# Altium PCB Communications_Board.PcbDoc
Units mm, origin at the board's own origin, x right, y up, seen from the top; angles counter-clockwise.
Board outline 85 x 80 mm, 4 copper layers (Top Layer, Gnd, DC Power, Bottom Layer), stack 1.782 mm thick; 97 components, 53 nets, 302 pads, 130 vias.
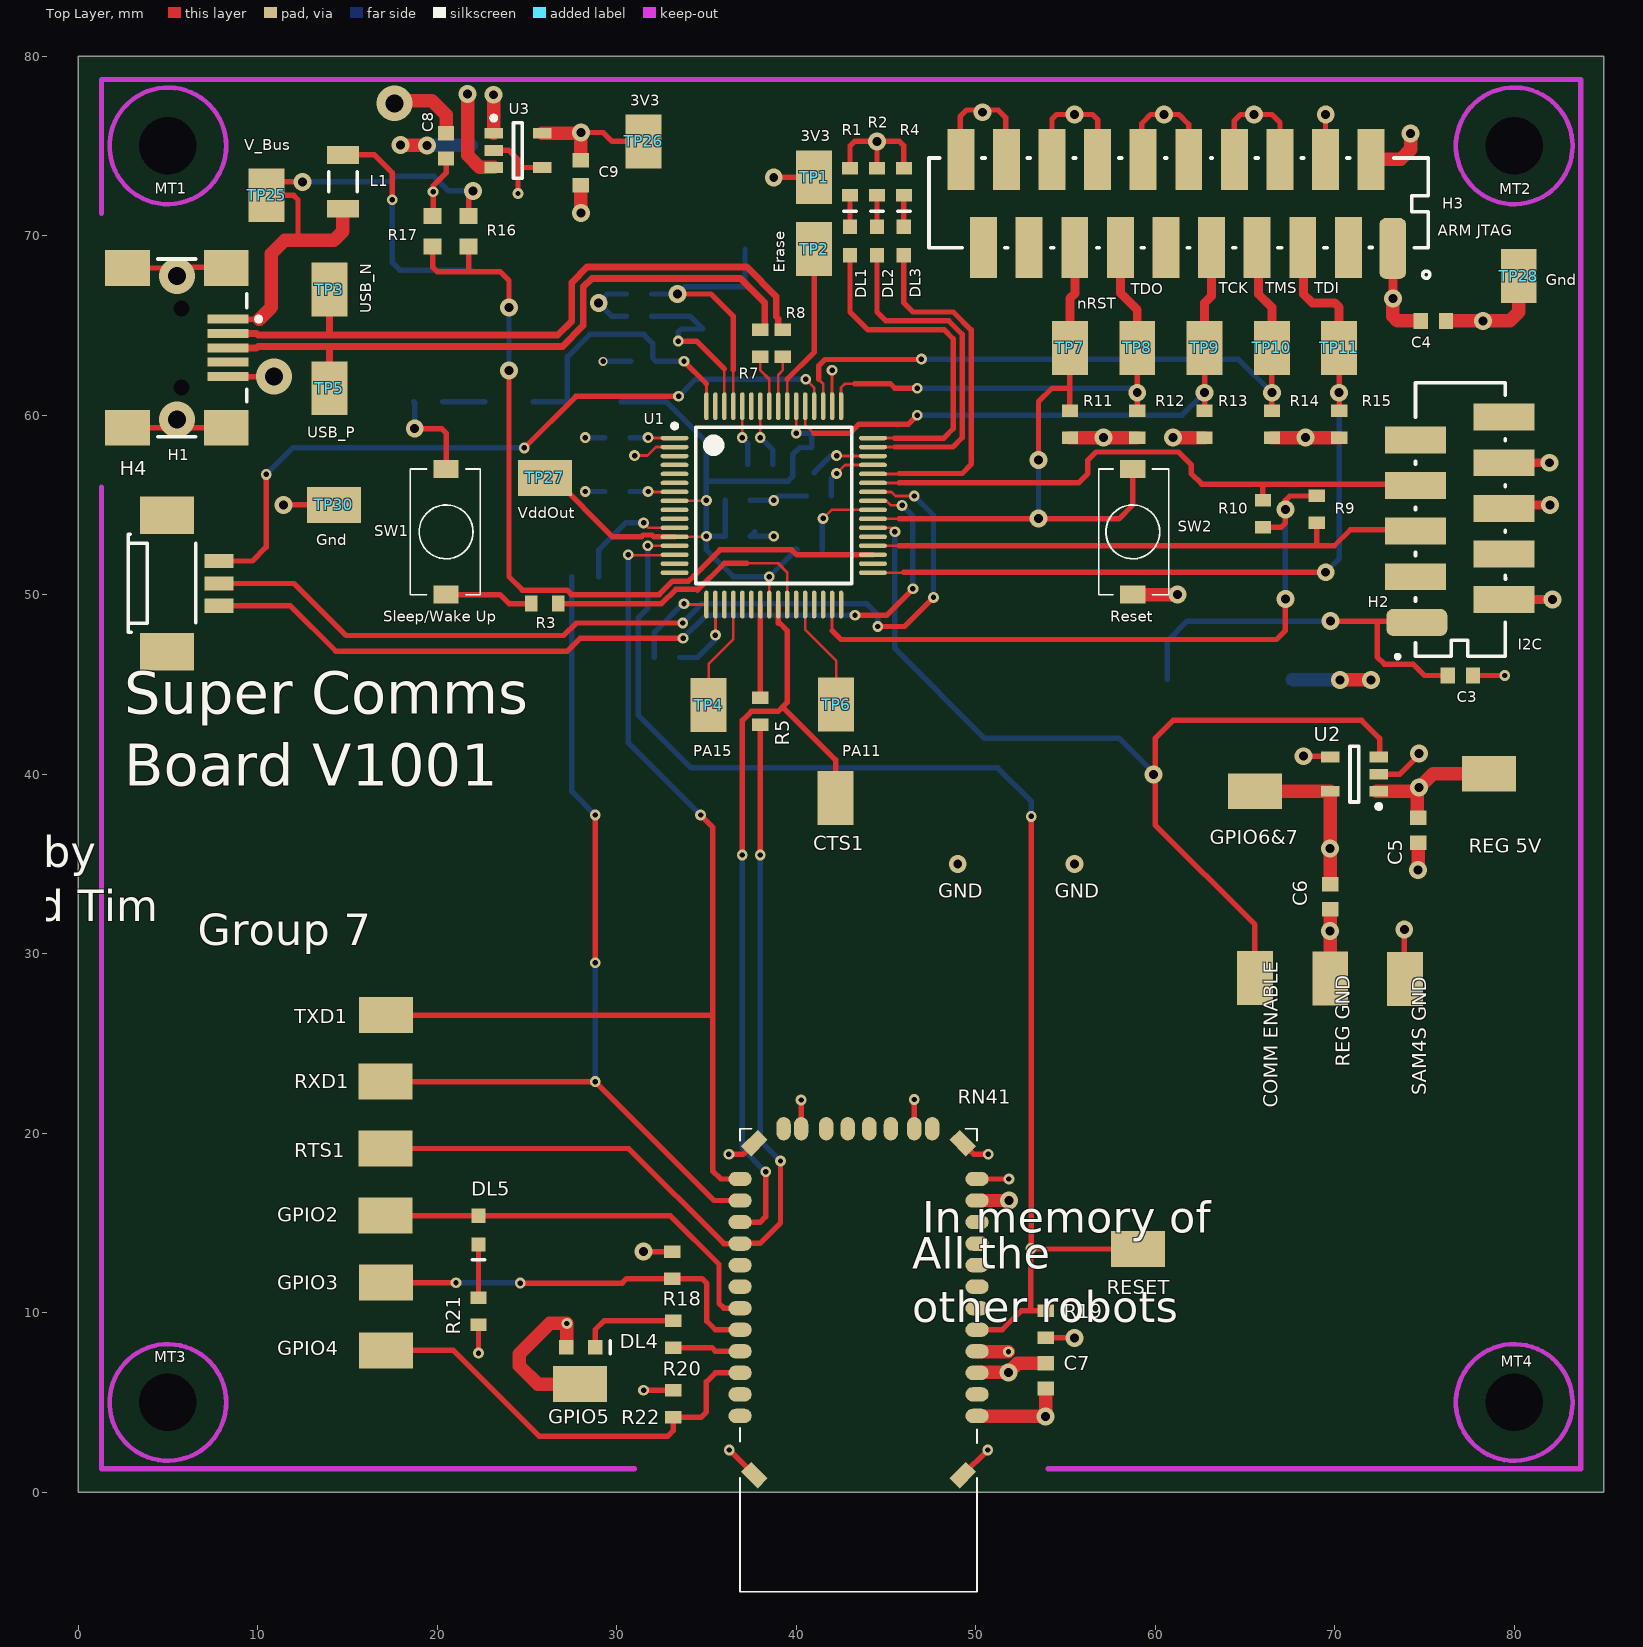
[diagram p0: Top Layer view]
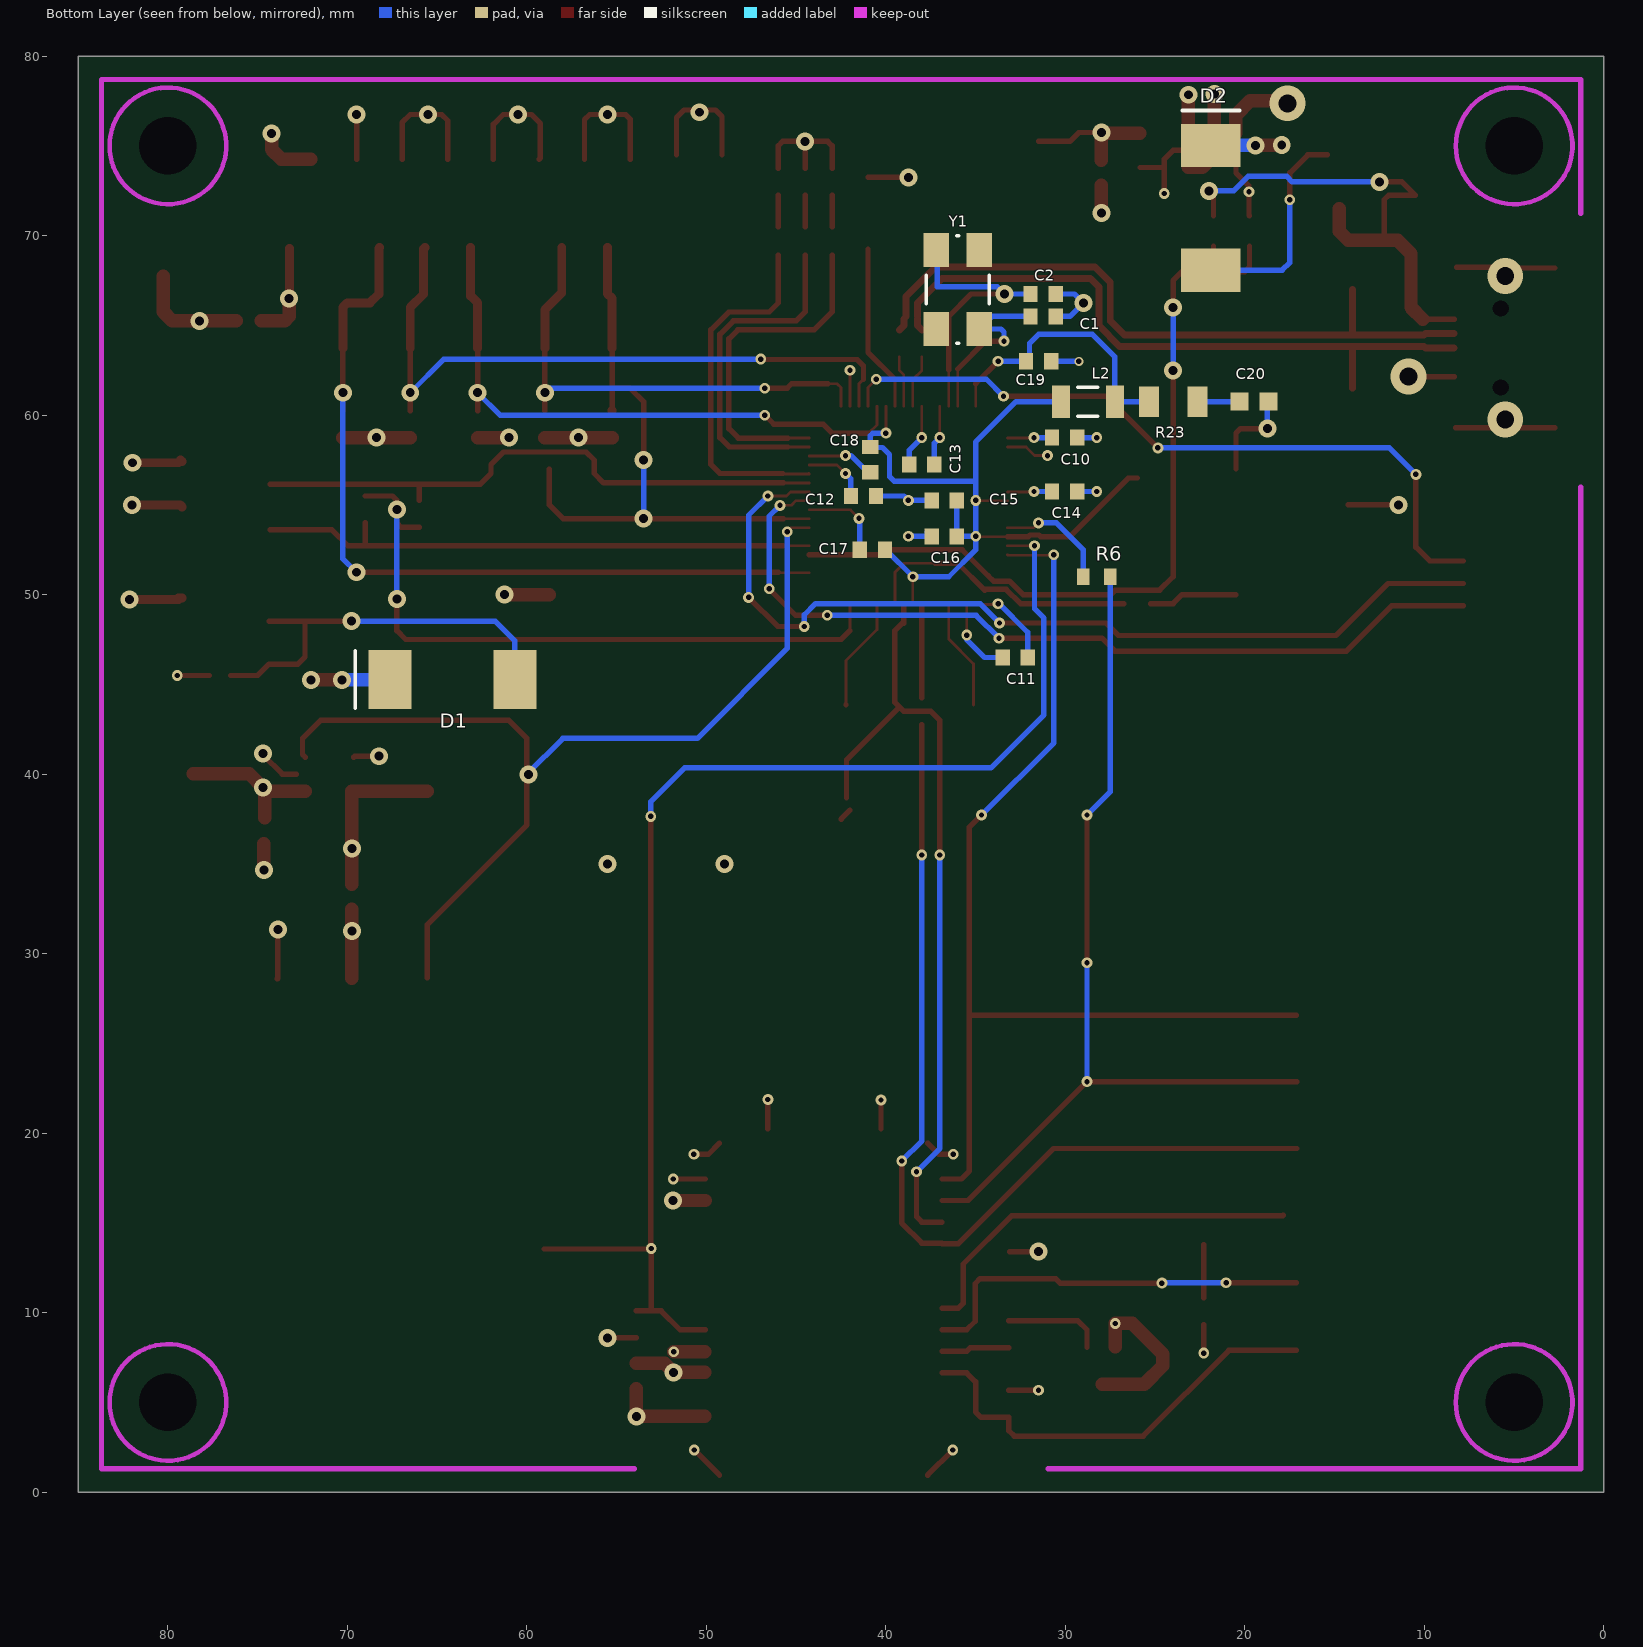
[diagram p1: Bottom Layer view, seen from below]
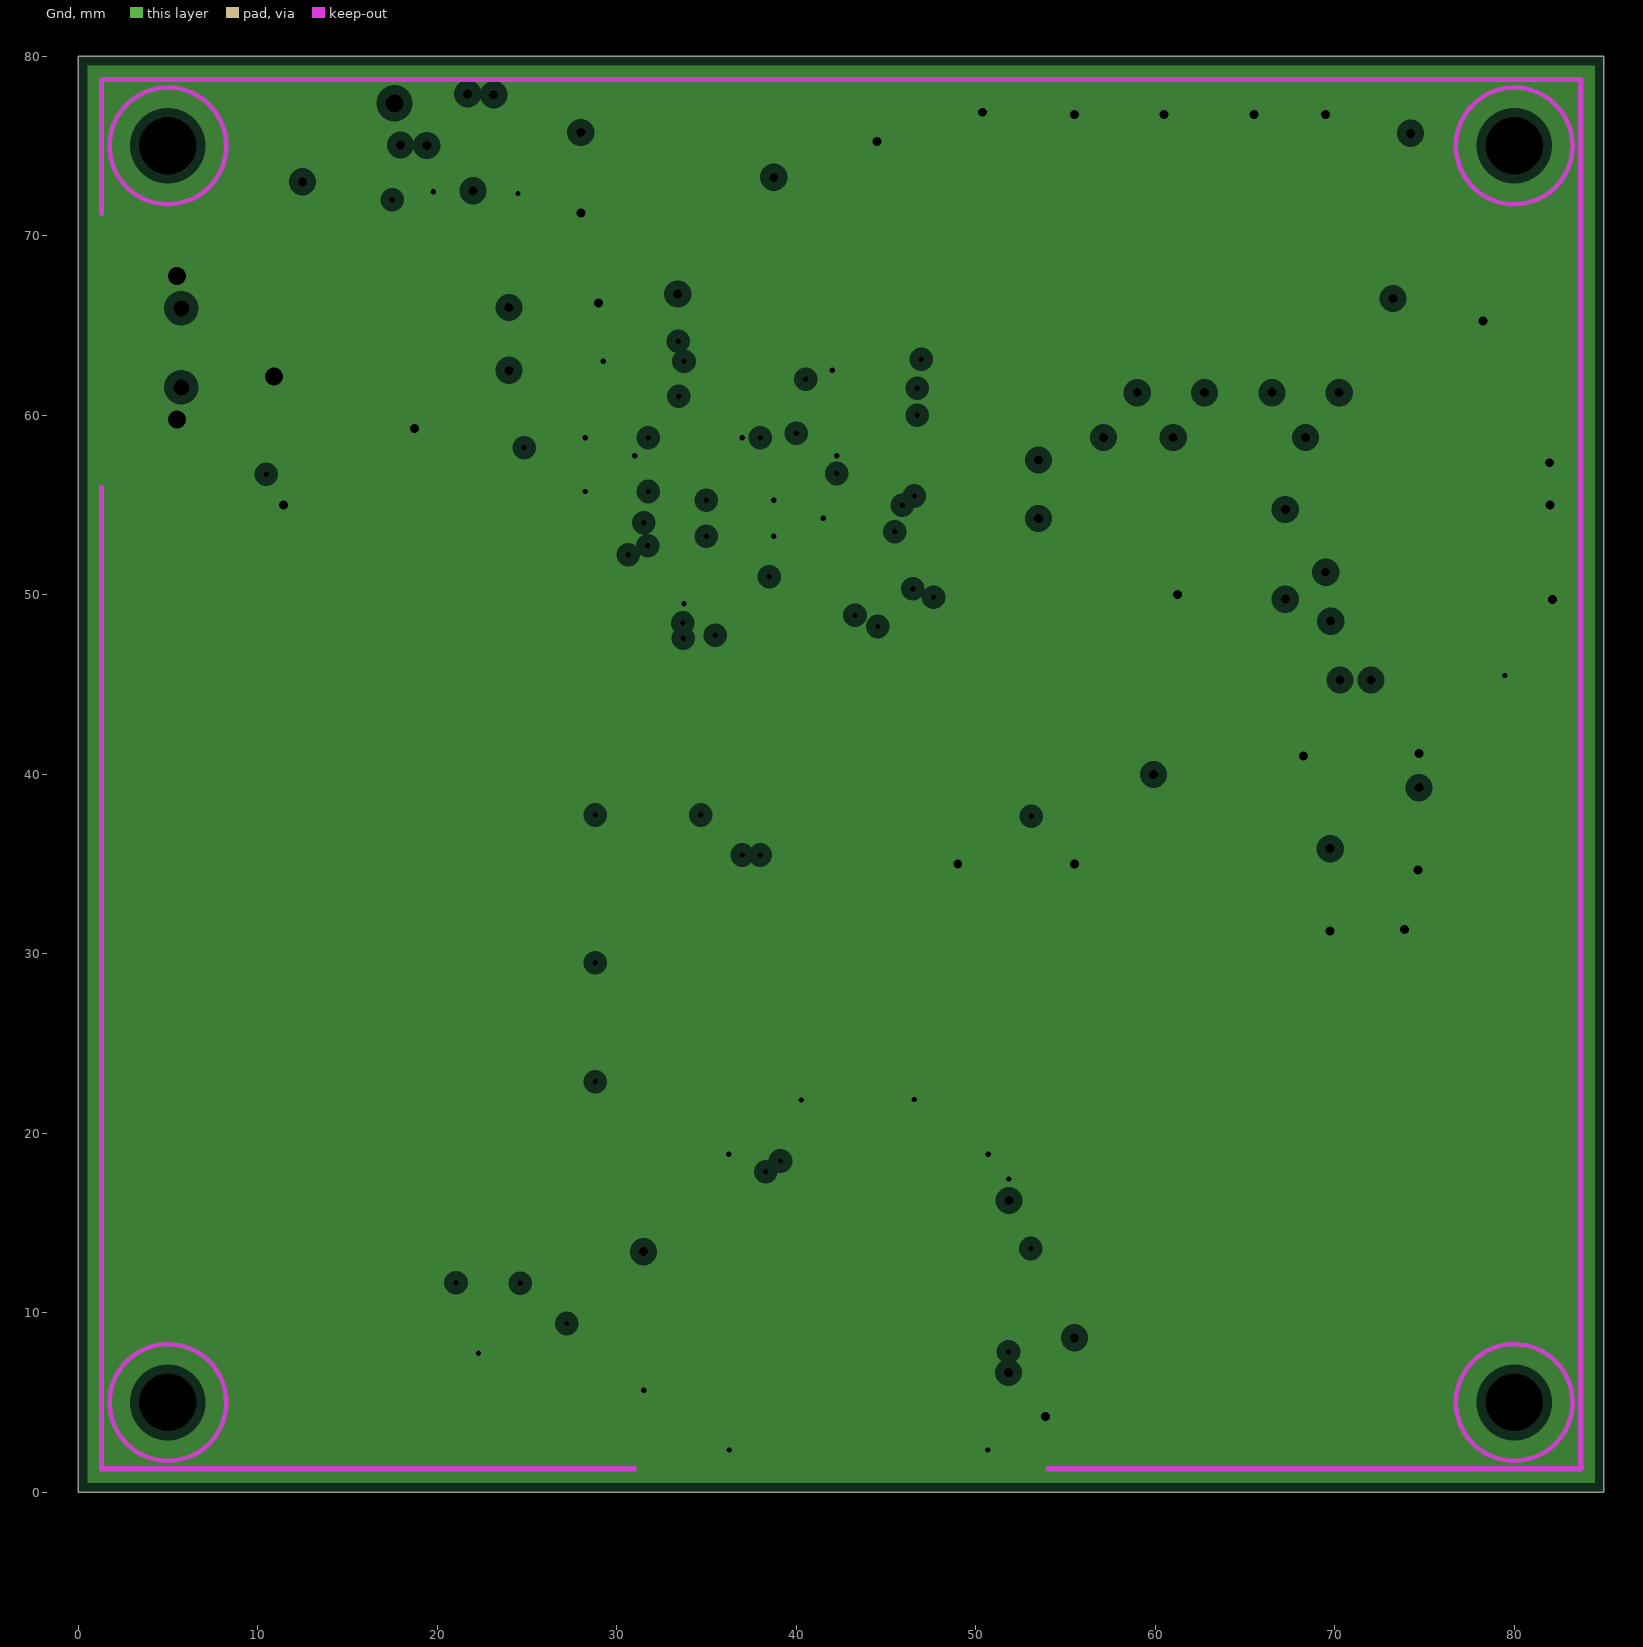
[diagram p2: Gnd, clearances drawn from the general rule]
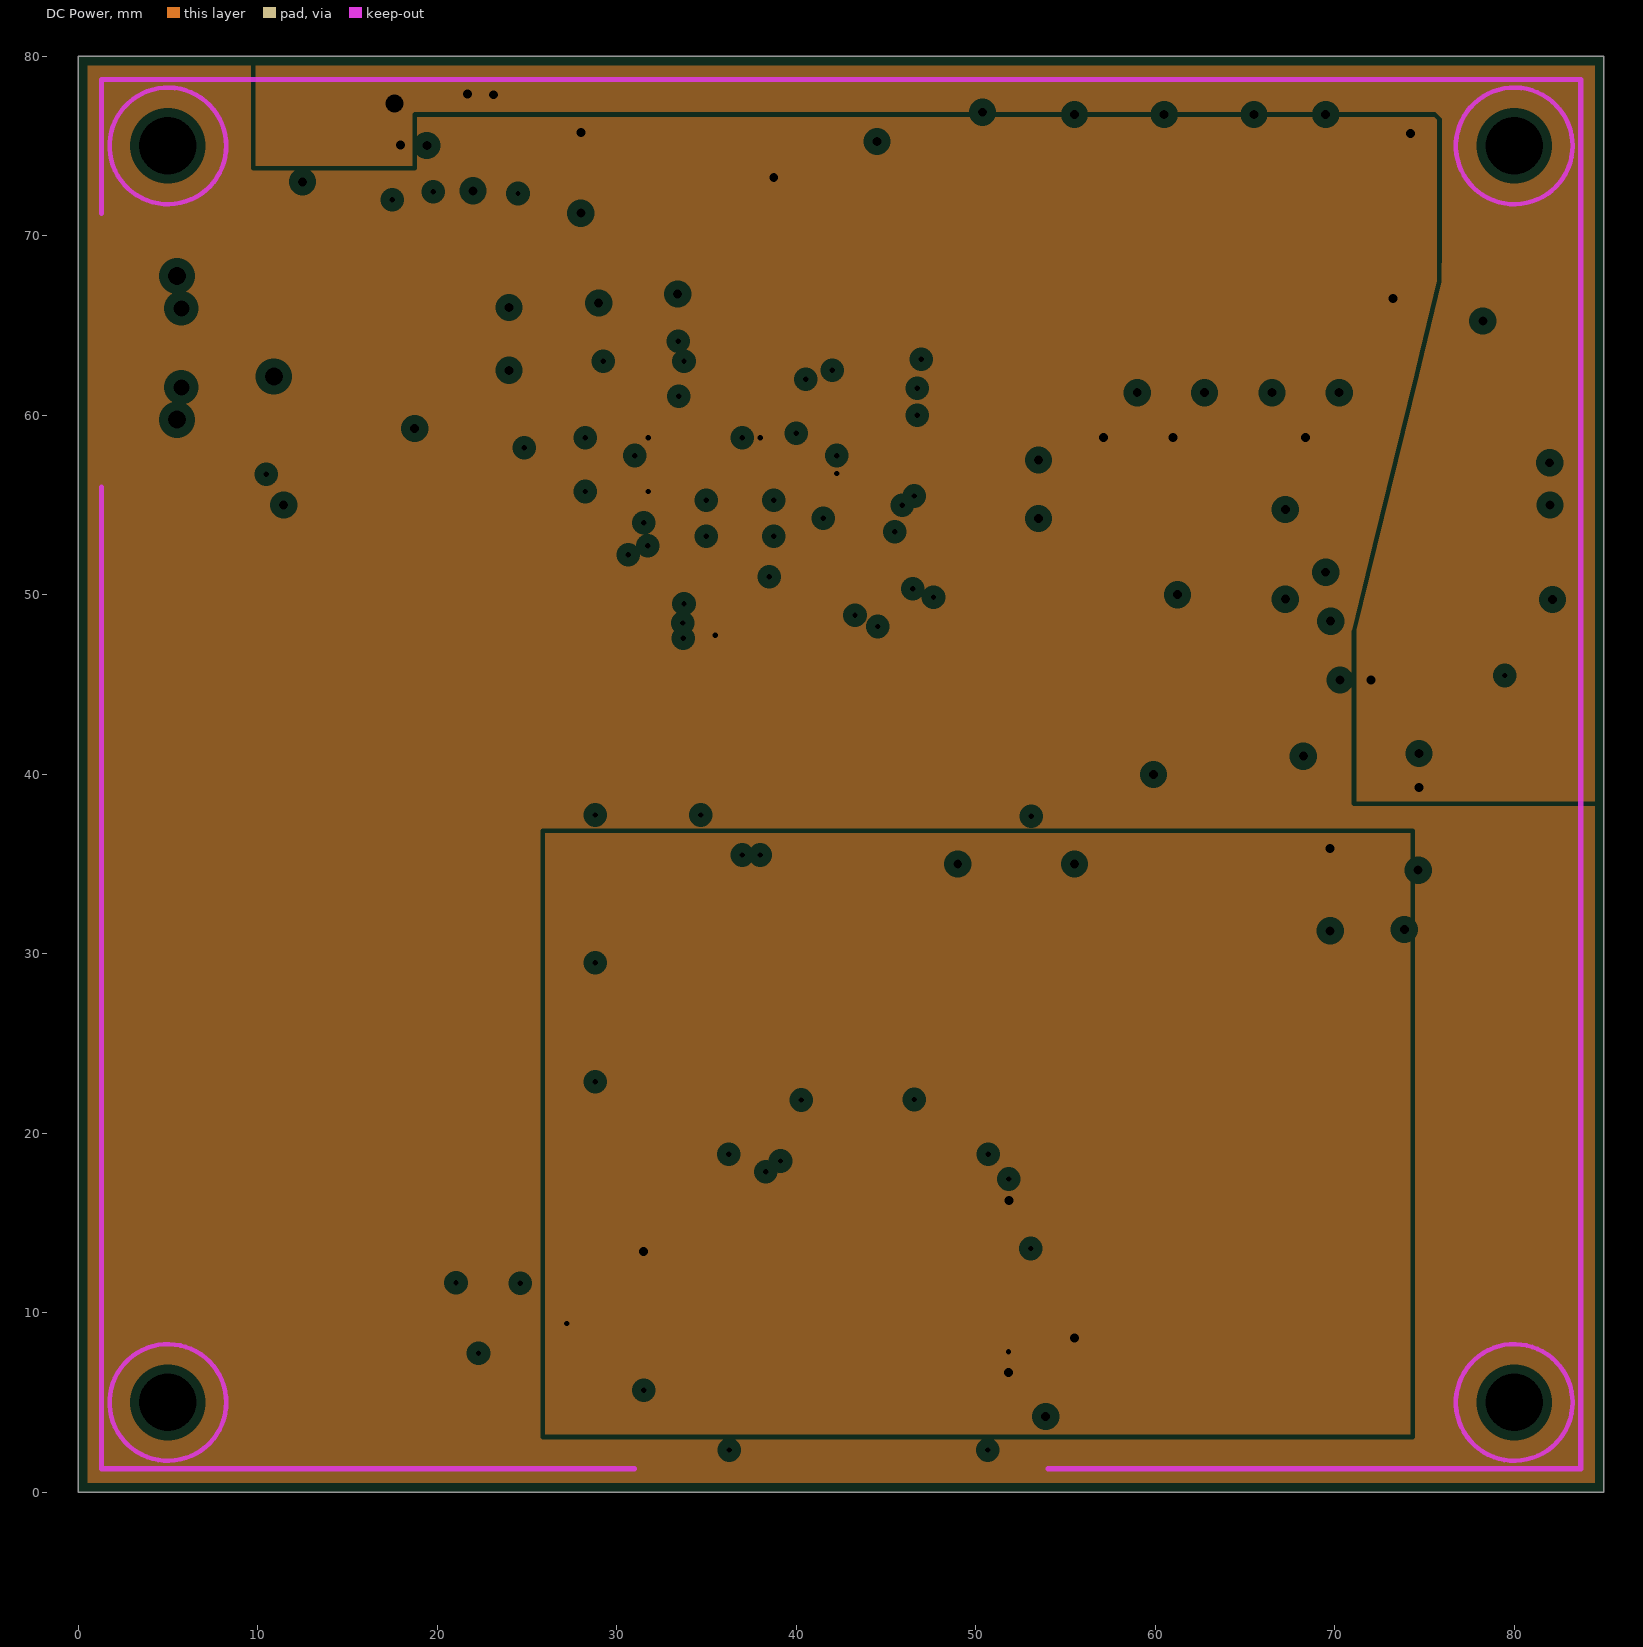
[diagram p3: DC Power, clearances drawn from the general rule]

## Layer stack, top to bottom
Top Solder: solder mask 0.0102, Solder Resist, Dk 3.5
Top Layer: signal copper 0.0356
Dielectric1: prepreg 0.32, FR-4, Dk 4.8
Gnd: plane copper 0.0356, net GND
Dielectric2: core 1, FR-4, Dk 4.8
DC Power: plane copper 0.0356, net (Multiple Nets)
Dielectric3: prepreg 0.32, FR-4, Dk 4.8
Bottom Layer: signal copper 0.0356
Bottom Solder: solder mask 0.0102, Solder Resist, Dk 3.5

## Board outline
0,0 85,0 85,80 0,80

## Design rules (kind name [scope] priority, off if disabled: settings)
Clearance Min_Clearance_Circuit_Labs [All] p1: gap=0.15 ignorepadtopadclearanceinfootprint=FALSE
DiffPairsRouting [All] p1: maxlimit=0.254 minlimit=0.254 mostfreqgap=0.254 toplayer_minwidth=0.381 toplayer_maxwidth=0.381 toplayer_prefwidth=0.381 bottomlayer_minwidth=0.381 bottomlayer_maxwidth=0.381 bottomlayer_prefwidth=0.381 maxuncoupledlength=12.7
FanoutControl Fanout_BGA [IsBGA] p1 off: bgadir=Out bgaviamode=Centered fanoutstyle=Auto fanoutdirection=Alternating viagrid=0.025 // Fanout_BGA (Default Rule)
HoleSize [All] p1: absolutevalues=TRUE maxlimit=10 minlimit=0.3 maxpercent=80.000 minpercent=20.000
MinimumAnnularRing [All] p1: minimumring=0.1
MinimumSolderMaskSliver [All] p1 off: minsoldermaskwidth=0.25
NetAntennae [All] p1: netantennaetolerance=1
PasteMaskExpansion [All] p1 off: expansion=0.2
PlaneClearance [All] p1: clearance=0.508
PlaneConnect [All] p1: planeconnectstyle=Relief reliefexpansion=0.508 reliefentries=4 reliefconductorwidth=0.254 reliefairgap=0.254
PolygonConnect [All] p1: connectstyle=Relief reliefconductorwidth=0.254 reliefentries=4 polygonreliefangle="90 Angle" airgapwidth=0.254
RoomDefinition Communications_Module [InComponentClass('Communications_Module')] p1: confinementstyle=ConfineIn formatcopy=TRUE lockcomponents=FALSE outline 4.2,-8.55 81.7,-8.55 81.7,44.8 4.2,44.8
RoomDefinition Communications_Board [InComponentClass('Communications_Board')] p2: confinementstyle=ConfineIn formatcopy=TRUE lockcomponents=FALSE outline -1.3,-0.175 83.675,-0.175 83.675,80.9 -1.3,80.9
RoomDefinition Communications_Power [InComponentClass('Communications_Power')] p3: confinementstyle=ConfineIn formatcopy=TRUE lockcomponents=FALSE outline 8.2,25 82.675,25 82.675,77.8 8.2,77.8
RoutingVias [All] p1: holewidth=0.5 width=1 viastyle="Through Hole" minholewidth=0.3 minwidth=0.6 maxholewidth=1 maxwidth=2
SMDNeckDown [All] p1 off: percent=50.000
SMDToCorner [All] p1: distance=98425
SMDToPlane [All] p1: distance=1968504
SilkToSolderMaskClearance SilkscreenOverComponentPads [IsPad] p1: minsilkscreentomaskgap=0.11 clearancetoexposedcopper=TRUE
SolderMaskExpansion [All] p1: expansion=0.102
ViasUnderSMD [All] p1: allowed=FALSE
Width [All] p1: maxlimit=2 minlimit=0.15 preferedwidth=0.3
21 further rules are at their usual default settings.

## Classes and differential pairs
net class TP17_Nets: +3V3COMM
net class TP14_Nets: NetTP14_1
net class TP29_Nets: GND
net class TP24_Nets: NetRN41_13
net class TP23_Nets: NetR22_2
net class TP22_Nets: NetR6_2
net class TP21_Nets: NetRN41_15
net class TP20_Nets: NetR5_2
net class TP19_Nets: NetR19_1
net class TP18_Nets: NetDL5_2
net class DL4_Nets: +3V3COMM NetDL4_1 NetTP18_1
net class TP16_Nets: +3V3COMM
net class TP13_Nets: GND
net class TP12_Nets: +5V
net class R23_Nets: NetC19_2 NetC20_2
net class R22_Nets: GND NetR22_2
net class R21_Nets: GND NetDL5_1
net class R20_Nets: NetDL4_1 NetR20_1
net class R19_Nets: +3V3COMM NetR19_1
net class R18_Nets: +3V3COMM NetR18_1
net class R10_Nets: NetR9_2 SDA
net class R9_Nets: NetR9_2 SCL
net class L2_Nets: NetC19_2 VDDOUT
net class H4_Nets: GPIO1 GPIO2 GPIO3
net class TP28_Nets: GND
net class DL5_Nets: NetDL5_1 NetDL5_2
net class D2_Nets: +5V NetD2_1
net class D1_Nets: +5V NetC3_2
net class C20_Nets: GND NetC20_2
net class C19_Nets: GND NetC19_2
net class C14_Nets: +3V3 GND
net class C13_Nets: +3V3 GND
component class Communications_Module: C5 C6 C7 "COMM ENABLE" CTS1 DL4 DL5 GPIO2 GPIO3 GPIO4 GPIO5 GPIO6&7 R18 R19 R20 R21 R22 "REG 5V" "REG GND" RESET RN41 RTS1 RXD1 TP13 TP17 TP18 TP19 TP20 TP21 TP22 TP23 TXD1 U2
net class C17_Nets: GND VDDOUT
net class C16_Nets: GND VDDOUT
net class C12_Nets: +3V3 GND
net class C3_Nets: GND NetC3_2 NetR16_1
component class Communications_Board: C1 C2 C3 C4 D1 DL1 DL2 DL3 H1 H2 H3 H4 MT1 MT2 MT3 MT4 R1 R2 R3 R4 R5 R6 R7 R8 R9 R10 R11 R12 R13 R14 R15 R16 R17 SW1 SW2 TP1 TP2 TP3 TP4 TP5 TP6 TP7 TP8 TP9 TP10 TP11 U1 Y1
component class Communications_Power: C8 C9 C10 C11 C12 C13 C14 C15 C16 C17 C18 C19 C20 D2 L1 L2 R23 "REG 5V" TP25 TP26 TP27 TP28 TP30 U3
net class C1_Nets: GND NetC1_2
net class C2_Nets: GND NetC2_2
net class C11_Nets: +3V3 GND
net class C4_Nets: +3V3 GND
net class C5_Nets: +5V GND
net class C6_Nets: +3V3COMM GND
net class C7_Nets: +3V3COMM GND
net class RN41_Nets: +3V3COMM GND NetDL5_2 NetR5_2 NetR6_2 NetR18_1 NetR19_1 NetR20_1 NetR22_2 NetRN41_13 NetRN41_15
net class C9_Nets: +3V3 GND
net class C10_Nets: +3V3 GND
net class TP30_Nets: GND
net class C18_Nets: GND VDDOUT
net class C15_Nets: GND VDDOUT
net class DL1_Nets: LED1 NetDL1_1
net class DL2_Nets: LED2 NetDL2_1
net class DL3_Nets: LED3 NetDL3_1
net class H1_Nets: GND NetH1_4 USB_N USB_P VBUS
net class H2_Nets: GND NetC3_2 NetH2_3 NetH2_4 NetH2_9 NetH2_10 SCL SDA
net class H3_Nets: +3V3 GND NetH3_3 NetH3_11 NetH3_17 NetH3_19 NRST TCK TDI TDO TMS
net class U2_Nets: +3V3COMM +5V GND NetTP14_1
net class L1_Nets: NetD2_1 VBUS
net class R1_Nets: GND NetDL1_1
net class R2_Nets: GND NetDL2_1
net class R3_Nets: NetR3_1 NetR3_2
net class R4_Nets: GND NetDL3_1
net class R5_Nets: NetR5_1 NetR5_2
net class R6_Nets: NetR6_1 NetR6_2
net class R7_Nets: NetR7_2 USB_P
net class R8_Nets: NetR8_2 USB_N
net class R11_Nets: +3V3 NRST
net class R12_Nets: +3V3 TDO
net class R13_Nets: +3V3 TCK
net class R14_Nets: +3V3 TMS
net class R15_Nets: +3V3 TDI
net class R16_Nets: "USB DETECT" VBUS
net class R17_Nets: GND "USB DETECT"
net class SW1_Nets: GND NetR3_2
net class SW2_Nets: GND NRST
net class TP1_Nets: +3V3
net class TP2_Nets: ERASE
net class TP3_Nets: USB_N
net class TP4_Nets: NetTP4_1
net class TP5_Nets: USB_P
net class TP6_Nets: NetTP6_1
net class TP7_Nets: NRST
net class TP8_Nets: TDO
net class TP9_Nets: TCK
net class TP10_Nets: TMS
net class TP11_Nets: TDI
net class TP25_Nets: VBUS
net class TP26_Nets: +3V3
net class TP27_Nets: VDDOUT
net class TP15_Nets: NetR18_1
net class U1_Nets: +3V3 ERASE GND GPIO1 GPIO2 GPIO3 LED1 LED2 LED3 NetC1_2 NetC2_2 NetC19_2 NetR3_1 NetR5_1 NetR6_1 NetR7_2 NetR8_2 NetR9_2 NetR19_1 NetRN41_13 NetRN41_15 NetTP4_1 NetTP6_1 NetTP14_1 NetU1_3 NetU1_4 NetU1_5 NetU1_6 NetU1_9 NetU1_10 NetU1_11 NetU1_13 NetU1_14 NetU1_15 NetU1_16 NetU1_19 NetU1_21 NetU1_22 NetU1_23 NetU1_25 NetU1_27 NetU1_29 NetU1_30 NetU1_32 NetU1_34 NetU1_37 NetU1_38 NetU1_41 NetU1_42 NetU1_52 NetU1_59 NetU1_63 NRST SCL SDA TCK TDI TDO TMS "USB DETECT" VDDOUT
net class U3_Nets: +3V3 +5V GND
net class Y1_Nets: NetC1_2 NetC2_2
net class C8_Nets: +5V GND
differential pair USB: +USB_P -USB_N

## Components (designator, comment, footprint, x,y, rotation, side; value= is the part's Value field where it differs from the comment)
C1 "10pF" CAPC1608L 31.25,65.5 r0 bottom
C2 "10pF" CAPC1608L 31.25,66.75 r0 bottom
C3 "100nF" CAPC1608L 77,45.5 r180 top
C4 "100nF" CAPC1608L 75.5,65.25 r180 top
C5 "10uF" CAPC1608L 74.65,36.875 r270 top
C6 "10uF" CAPC1608L 69.75,33.175 r270 top
C7 "100pF" CAPC1608L 53.9,6.475 r90 top
C8 "10uF" CAPC1608L 20.5,75 r270 top
C9 "10uF" CAPC1608L 28,73.5 r270 top
C10 "100nF" CAPC1608L 30.05,58.75 r0 bottom
C11 "100nF" CAPC1608L 32.8,46.5 r0 bottom
C12 "100nF" CAPC1608L 41.25,55.5 r0 bottom
C13 "100nF" CAPC1608L 38,57.25 r0 bottom
C14 "100nF" CAPC1608L 30.05,55.75 r0 bottom
C15 "100nF" CAPC1608L 36.75,55.25 r180 bottom
C16 "100nF" CAPC1608L 36.75,53.25 r180 bottom
C17 "100nF" CAPC1608L 40.75,52.5 r180 bottom
C18 "100nF" CAPC1608L 40.875,57.525 r90 bottom
C19 "100nF" CAPC1608L 31.5,63 r0 bottom
C20 "4.7uF" CAPC1608N 19.5,60.75 r0 bottom
"COMM ENABLE" "Gnd" TP_0805 65.55,28.65 r90 top (schematic designator TP14)
CTS1 "Gnd" TP_0805 42.2,38.675 r90 top (schematic designator TP21)
D1 "VS-30BQ015TRPBF" SMC 64.15,45.275 r0 bottom
D2 "VS-30BQ015TRPBF" SMC 21.9,71.55 r90 bottom
DL1 "Dark Green" WL-SMCW0603 43,70.5 r270 top
DL2 "Yellow" WL-SMCW0603 44.5,70.5 r270 top
DL3 "Red" WL-SMCW0603 46,70.5 r270 top
DL4 "Blue" WL-SMCW0603 28.8,8.075 r180 top
DL5 "Blue" WL-SMCW0603 22.3,13.8 r90 top
GPIO2 "Gnd" TP_0805 17.125,15.425 r0 top (schematic designator TP18)
GPIO3 "Gnd" TP_0805 17.15,11.675 r0 top (schematic designator TP15)
GPIO4 "Gnd" TP_0805 17.15,7.9 r0 top (schematic designator TP23)
GPIO5 "Gnd" TP_0805 27.95,6.025 r180 top (schematic designator TP17)
GPIO6&7 "Gnd" TP_0805 65.55,39.05 r0 top (schematic designator TP16)
H1 "JS_USB_MINI_B" USB/SM0.8-6H5 0.5,63.75 r180 top
H2 "I2C" 188275-10 76.961,54.175 r90 top
H3 "ARM JTAG" 188275-20 61.235,71.789 r180 top
H4 "SMD Horiz 1.25mm" SD-53261-0319 7.85,51.875 r90 top
L1 "Ferrite Bead" INDC3216L 14.75,73 r90 top value="1A max, Idc 0.3R,"
L2 "Ferrite Bead" INDC3216L 28.75,60.75 r0 bottom value="1A max, Idc 0.3R,"
MT1 "M3.2 NPTH" MNT-HOLE_3.2mm_NPTH 5,75 r0 top
MT2 "M3.2 NPTH" MNT-HOLE_3.2mm_NPTH 80,75 r0 top
MT3 "M3.2 NPTH" MNT-HOLE_3.2mm_NPTH 5,5 r0 top
MT4 "M3.2 NPTH" MNT-HOLE_3.2mm_NPTH 80,5 r0 top
R1 "62R" RESC1608L 43,73 r90 top
R2 "220R" RESC1608L 44.5,73 r90 top
R3 "2K2" RESC1608L 26,49.5 r180 top
R4 "220R" RESC1608L 46,73 r90 top
R5 "1K" RESC1608L 38,43.5 r270 top
R6 "1K" RESC1608L 28.25,51 r180 bottom
R7 "27R" RESC1608L 38,64 r270 top
R8 "27R" RESC1608L 39.25,64 r270 top
R9 "2K2" RESC1608L 69,54.75 r90 top
R10 "2K2" RESC1608L 66,54.5 r270 top
R11 "100K" RESC1608L 55.25,59.5 r270 top
R12 "100K" RESC1608L 59,59.5 r270 top
R13 "100K" RESC1608L 62.75,59.5 r270 top
R14 "100K" RESC1608L 66.5,59.5 r270 top
R15 "100K" RESC1608L 70.25,59.5 r270 top
R16 "27K" RESC1608N 21.75,70.25 r90 top
R17 "47K" RESC1608N 19.75,70.25 r270 top
R18 "100K" RESC1608L 33.1,12.65 r90 top
R19 "1K" RESC1608L 53.9,9.35 r270 top
R20 "220R" RESC1608L 33.15,8.8 r90 top
R21 "220R" RESC1608L 22.3,10.075 r270 top
R22 "100K" RESC1608L 33.15,4.925 r270 top
R23 "1R" RESC3216L 24,60.75 r0 bottom
"REG 5V" "V_Bus" TP_0805 78.6,40.025 r0 top (schematic designator TP12)
"REG GND" "Gnd" TP_0805 69.75,28.625 r270 top (schematic designator TP13)
RESET "Gnd" TP_0805 59.05,13.55 r0 top (schematic designator TP19)
RN41 "RN41" PCBComponent_1 43.475,7.675 r180 top
RTS1 "Gnd" TP_0805 17.125,19.15 r180 top (schematic designator TP20)
RXD1 "Gnd" TP_0805 17.125,22.875 r0 top (schematic designator TP22)
"SAM4S GND" "Gnd" TP_0805 73.925,28.6 r270 top (schematic designator TP29)
SW1 "Sleep/Wake Up" KSR211G 20.5,50 r90 top
SW2 "Reset" KSR211G 58.75,57 r270 top
TP1 "3V3" TP_0805 41,73.25 r90 top
TP2 "Erase" TP_0805 41,69.25 r90 top
TP3 "USB_N" TP_0805 14,67 r90 top
TP4 "PA15" TP_0805 35.125,43.85 r90 top
TP5 "USB_P" TP_0805 14,61.5 r90 top
TP6 "PA11" TP_0805 42.225,43.875 r90 top
TP7 "nRST" TP_0805 55.25,63.75 r90 top
TP8 "TDO" TP_0805 59,63.75 r90 top
TP9 "TCK" TP_0805 62.75,63.75 r90 top
TP10 "TMS" TP_0805 66.5,63.75 r90 top
TP11 "TDI" TP_0805 70.25,63.75 r90 top
TP25 "V_Bus" TP_0805 10.5,72.25 r90 top
TP26 "3V3" TP_0805 31.5,75.25 r270 top
TP27 "VddOut" TP_0805 26,56.5 r0 top
TP28 "Gnd" TP_0805 80.25,67.75 r90 top
TP30 "Gnd" TP_0805 14.25,55 r0 top
TXD1 "Gnd" TP_0805 17.15,26.575 r0 top (schematic designator TP24)
U1 "ATSAM4S8BA-ANR" LQFP64_L 38.75,54.975 r0 top
U2 "TLV70233DBVR" SOT95P280X145-5N 71.1,40 r180 top
U3 "TLV70233DBVR" SOT95P280X145-5N 24.5,74.75 r0 top
Y1 "18.432MHz" 6.0X3.5-4 36,67 r270 bottom

## Footprints (in the part's own frame and the unit in brackets; to place one, negate y for a bottom-side part, rotate by r counter-clockwise, add the part's x,y. Pads: shape width x height; smd on the part's side, far side on the other; paste and mask are expansions set on the pad)
6.0X3.5-4 [mm] "4 SMD 6.0X3.5 mm No Lead Crystal"
  rect 1.9x1.4 smd: 1(-2.2,-1.2) 2(2.2,-1.2) 3(2.2,1.2) 4(-2.2,1.2)
  silkscreen extent -3,-1.75 3,1.75, body extent -3,-1.75 3,1.75, height 1.2
188275-10 [mm] "MicroMatch Ribbon Connector 10 way"
  rrect50% 1.5x3.4 smd: 1(-5.724,2.385)
  rect 1.5x3.4 smd: 2(-4.445,-2.461) 3(-3.175,2.461) 4(-1.905,-2.461) 5(-0.635,2.461) 6(0.635,-2.461) 7(1.905,2.461) 8(3.175,-2.461) 9(4.445,2.461) 10(5.715,-2.461)
  silkscreen extent -7.74,-2.55 7.62,3.57, body extent -7.62,-2.5 7.64,2.43, height 8.45
188275-20 [mm] "MicroMatch Ribbon Connector 20 way"
  rrect50% 1.5x3.4 smd: 1(-12,2.5)
  rect 1.5x3.4 smd: 2(-10.795,-2.461) 3(-9.525,2.461) 4(-8.255,-2.461) 5(-6.985,2.461) 6(-5.715,-2.461) 7(-4.445,2.461) 8(-3.175,-2.461) 9(-1.905,2.461) 10(-0.635,-2.461) 11(0.635,2.461) 12(1.905,-2.461) 13(3.175,2.461) 14(4.445,-2.461) 15(5.715,2.461) 16(6.985,-2.461) 17(8.255,2.461) 18(9.525,-2.461) 19(10.795,2.461) 20(12.065,-2.461)
  silkscreen extent -14.06,-2.54 13.83,4.16, body extent -13.96,-2.54 13.93,2.46, height 8.45
CAPC1608L [mm] "Chip Capacitor, Body 1.6x0.8mm, IPC High Density"
  rect 0.8x0.9 smd: 1(-0.7,0) 2(0.7,0)
  body extent -0.87,-0.48 0.87,0.48, height 0.85
CAPC1608N [mm] "Chip Capacitor, Body 1.6x0.8mm, IPC Medium Density"
  rect 1x1 smd: 1(-0.8,0) 2(0.8,0)
  body extent -0.87,-0.48 0.87,0.48, height 0.85
INDC3216L [mm] "Chip Inductor, Body 3.2x1.6mm, IPC High Density"
  rect 1x1.8 smd: 1(-1.5,0) 2(1.5,0)
  silkscreen extent -0.55,-0.8 0.55,0.8, body extent -1.75,-0.95 1.75,0.95, height 1.9
KSR211G [mm] "Subminature Tactile Switch in SMT"
  rect 1x1.4 smd: 1(0,0) 2(7,0)
  silkscreen extent 0,-1.9 7,2, body extent 0,-1.9 7,2, height 4.25
LQFP64_L [mm] "Thin QFP, 64-Leads, Body 10x10mm, Pitch 0.5mm, IPC High Density"
  oval 1.55x0.25 smd mask+0.07: 1(-5.525,3.75) 2(-5.525,3.25) 3(-5.525,2.75) 4(-5.525,2.25) 5(-5.525,1.75) 6(-5.525,1.25) 7(-5.525,0.75) 8(-5.525,0.25) 9(-5.525,-0.25) 10(-5.525,-0.75) 11(-5.525,-1.25) 12(-5.525,-1.75) 13(-5.525,-2.25) 14(-5.525,-2.75) 15(-5.525,-3.25) 16(-5.525,-3.75) 33(5.525,-3.75) 34(5.525,-3.25) 35(5.525,-2.75) 36(5.525,-2.25) 37(5.525,-1.75) 38(5.525,-1.25) 39(5.525,-0.75) 40(5.525,-0.25) 41(5.525,0.25) 42(5.525,0.75) 43(5.525,1.25) 44(5.525,1.75) 45(5.525,2.25) 46(5.525,2.75) 47(5.525,3.25) 48(5.525,3.75)
  oval 0.25x1.55 smd mask+0.07: 17(-3.75,-5.525) 18(-3.25,-5.525) 19(-2.75,-5.525) 20(-2.25,-5.525) 21(-1.75,-5.525) 22(-1.25,-5.525) 23(-0.75,-5.525) 24(-0.25,-5.525) 25(0.25,-5.525) 26(0.75,-5.525) 27(1.25,-5.525) 28(1.75,-5.525) 29(2.25,-5.525) 30(2.75,-5.525) 31(3.25,-5.525) 32(3.75,-5.525) 49(3.75,5.525) 50(3.25,5.525) 51(2.75,5.525) 52(2.25,5.525) 53(1.75,5.525) 54(1.25,5.525) 55(0.75,5.525) 56(0.25,5.525) 57(-0.25,5.525) 58(-0.75,5.525) 59(-1.25,5.525) 60(-1.75,5.525) 61(-2.25,5.525) 62(-2.75,5.525) 63(-3.25,5.525) 64(-3.75,5.525)
  silkscreen extent -5.65,-4.35 4.35,4.55, body extent -5,-5 5,5, height 1.6
MNT-HOLE_3.2mm_NPTH [mm] "Mounting Hole 3.2mm non plated"
  round 0 hole 3.2 unplated: 1(0,0)
  Keep-Out Layer circle w0.254: c0,0 r3.25
PCBComponent_1 [mm]
  oval 1.3x0.8 smd: 1(-6.6,3.425) 2(-6.6,2.225) 3(-6.6,1.025) 4(-6.6,-0.175) 5(-6.6,-1.375) 6(-6.6,-2.575) 7(-6.6,-3.775) 8(-6.6,-4.975) 9(-6.6,-6.175) 10(-6.6,-7.375) 11(-6.6,-8.575) 12(-6.6,-9.775) 13(6.6,-9.775) 14(6.6,-8.575) 15(6.6,-7.375) 16(6.6,-6.175) 17(6.6,-4.975) 18(6.6,-3.775) 19(6.6,-2.575) 20(6.6,-1.375) 21(6.6,-0.175) 22(6.6,1.025) 23(6.6,2.225) 24(6.6,3.425)
  oval 0.8x1.3 smd: 28(3.2,-12.575) 29(-3.1,-12.575) 30(4.175,-12.575) 31(1.8,-12.575) 32(0.6,-12.575) 33(-0.6,-12.575) 34(-1.8,-12.575) 35(-4.1,-12.575)
  rect 1.3x0.8 smd rot 45: 36(-5.8,6.725) 38(5.8,-11.775)
  rect 1.3x0.8 smd rot 135: 37(5.8,6.725) 39(-5.8,-11.775)
  silkscreen extent -6.6,-12.57 6.6,13.23, body extent -6.55,-12.52 6.55,13.18, height 2.1
RESC1608L [mm] "Chip Resistor, Body 1.6x0.8mm, IPC High Density"
  rect 0.7x0.9 smd: 1(-0.75,0) 2(0.75,0)
  body extent -0.85,-0.48 0.85,0.48, height 0.9
RESC1608N [mm] "Chip Resistor, Body 1.6x0.8mm, IPC Medium Density"
  rect 0.9x1 smd: 1(-0.85,0) 2(0.85,0)
  body extent -0.85,-0.48 0.85,0.48, height 0.6
RESC3216L [mm] "Chip Resistor, Body 3.1x1.6mm, IPC High Density"
  rect 1.1x1.7 smd: 1(-1.35,0) 2(1.35,0)
  body extent -1.68,-0.87 1.68,0.87, height 2.54
SD-53261-0319 [mm] "Molex Pico Blade 3 Pos Horiz SMD Header"
  rect 0.8x1.6 smd: 1(0,0) 2(-1.25,0)
  rect 0.81x1.6 smd: 3(-2.5,0)
  rect 2.1x3 smd: M(-5.05,2.9) M(2.55,2.9)
  silkscreen extent -3.98,1.3 1.5,5.05, body extent -3.88,1.13 1.4,4.94, height 3.45
SMC [mm] "DO-214-AB/SMC; 2 C-Bend Leads; Body 7.9 x 5.9 mm, inc. leads (LxW)"
  rect 2.4x3.3 smd: 1(-3.475,0) 2(3.475,0)
  silkscreen extent 5.43,-1.6 5.43,1.6
SOT95P280X145-5N [mm] "SOT23, 5-Leads, Body 2.90x2.80mm, Pitch 0.95mm, IPC Medium Density"
  rect 1.05x0.6 smd: 1(-1.35,0.95) 2(-1.35,0) 3(-1.35,-0.95) 4(1.35,-0.95) 5(1.35,0.95)
  silkscreen extent -1.48,-1.55 0.25,1.92, body extent -0.87,-1.52 0.87,1.53, height 1.45
TP_0805 [mm] "TestPoint SMD"
  rect 3x2 smd: 1(0,0)
  body extent -1.5,-1 1.5,1.1, height 1.4
USB/SM0.8-6H5 [mm] "Connector; USB2.0, Type B, SM; 5 Position; Right Angle"
  rect 2.3x0.5 smd mask+0.07: 1(-7.85,-1.6) 2(-7.85,-0.8) 3(-7.85,0) 4(-7.85,0.8) 5(-7.85,1.6)
  rect 2.5x2 smd: 6(-7.75,4.45) 7(-2.25,4.45) 8(-7.75,-4.45) 9(-2.25,-4.45)
  round 0.6 hole 0.9 unplated: MH1(-5.25,2.2) MH2(-5.25,-2.2)
  silkscreen extent -9.68,-4.95 -3.95,4.95, body extent -8.9,-4.95 0.7,4.95, height 3.9
WL-SMCW0603 [mm] "2.4 x 0.8 x 0.7mm LED"
  rect 0.8x0.8 smd: 1(0,0) 2(1.6,0)
  silkscreen extent -0.85,-0.35 -0.85,0.35

## Part data
C1 C2: library part CC_10pF_0603, "CAP CER 10pF COG/NPO 50V 0603", Code_IPC="1005 [0402]", PackageReference=0603, Storage Location="PCB Assembly WS", Supplier="ECE Dept"
C3 C4 C10 C11 C12 C13 C14 C15 C16 C17 C18 C19: library part CC_100nF_0603, "CAP CER 100nF X7R +-10% 50V 0603", Code_IPC="1608 [0603]", PackageReference=0603, Storage Location="PCB Assembly WS", Supplier="ECE Dept"
C5 C6 C8 C9: library part CC_10uF_0603, "CAP CER 10UF X5R +-20% 10V 0603", Voltage - Rated=10V, Storage Location="PCB Assembly WS", Supplier="ECE Dept"
C7: library part CC_100pF_0603, "CAP CER 100pF NPO/COG +-5% 50V 0603", Code_IPC="1608 [0603]", PackageReference=0603, Storage Location="PCB Assembly WS", Supplier="ECE Dept"
C20: library part CC_4.7uF_0603, "CAP CER 4.7uF X5R +-20%  10V 0603", Max Voltage=10V, Code_IPC=2012[0805], Note="Footprint corresponds to dimensions for bulk cassette packaging. This case size has tightened tolerances.", PackageReference=0805, Storage Location="PCB Assembly WS", Supplier="ECE Dept"
"COMM ENABLE" CTS1 GPIO2 GPIO3 GPIO4 GPIO5 GPIO6&7 "REG 5V" "REG GND" RESET RTS1 RXD1 "SAM4S GND" TP1 TP2 TP3 TP4 TP5 TP6 TP7 TP8 TP9 TP10 TP11 TP25 TP26 TP27 TP28 TP30 TXD1: library part TP_0805, "Test Point 2.0X0.9X1.2mm SMD", Manufacturer="TE Connectivity AMP Connectors", Manufacturer Part Number=1625854-2, Supplier Part Number 1=A106144CT-ND, Mounting Type="Surface Mount", Supplier 1=Digi-Key, Terminal="0.079\" x 0.049\" x 0.057\" (2.00mm x 1.25mm x 1.45mm)", Type="PC Test Point"
D1 D2: library part DS_VS-30BQD015TRPBF, "DIODE SCHOTTKY 15V 3A SMC", Current - Average Rectified (Io)=3A, Current - Reverse Leakage @ Vr="4mA @ 15V", Manufacturer="Vishay Semiconductor Diodes Division", Package / Case="DO-214AB, SMC", Supplier Part Number 1=30BQ015PBFCT-ND, Voltage - Forward (Vf) (Max) @ If="350mV @ 3A", Manufacturer Part Number=VS-30BQ015TRPBF, Pricing="1=1.59, 10=1.417, 25=1.2504, 100=1.1253, 250=0.97944, 500=0.87526, 1000=0.6877 (NZD)", Storage Location="PCB Assembly WS", Supplier="ECE Dept", Supplier 1=Digi-Key, Supplier 2=Farnell, Supplier 3=Mouser, Supplier Part Number 2=9101250, Supplier Part Number 3=N/A
DL1: library part DL_150060GS75000, "LED Dk Green 430mcd 0603 SMD", Forward Current If=30, Forward Voltage=3.2, Manufacturer="WURTH ELEKTRONIK", Manufacturer Part Number=150060GS75000, Supplier Part Number 1=2322070, LED Colour="Dark Green", LED Mounting=SMD, Lens Shape=Rectangular, Luminous Intensity=430, Storage Location="PCB Assembly WS", Supplier="ECE Dept", Supplier 1=Farnell, Viewing Angle=140°, Wavelength Typ=520
DL2: library part DL_150060YS75000, "LED Yellow 120mcd 0603 SMD", Forward Current If=30, Forward Voltage=2, Manufacturer="WURTH ELEKTRONIK", Manufacturer Part Number=150060YS75000, Supplier Part Number 1=2322074, LED Colour=Yellow, LED Mounting=SMD, Lens Shape=Rectangular, Luminous Intensity=120, Storage Location="PCB Assembly WS", Supplier="ECE Dept", Supplier 1=Farnell, Viewing Angle=140°, Wavelength Typ=590
DL3: library part DL_150060RS75000, "LED Red 250mcd 0603 SMD", Forward Current If=30, Forward Voltage=2, Manufacturer="WURTH ELEKTRONIK", Manufacturer Part Number=150060RS75000, Supplier Part Number 1=2322071, LED Colour=Red, LED Mounting=SMD, Lens Shape=Rectangular, Luminous Intensity=250, Storage Location="PCB Assembly WS", Supplier="ECE Dept", Supplier 1=Farnell, Viewing Angle=140°, Wavelength Typ=625
DL4 DL5: library part DL_150060BS75000, "LED Blue 270mcd 0603 SMD", Forward Current If=30, Forward Voltage=3.2, Manufacturer="WURTH ELEKTRONIK", Manufacturer Part Number=150060BS75000, Supplier Part Number 1=2322069, LED Colour=Blue, Luminous Intensity=270, Pricing="1=0.3844, 50=0.3252, 100=0.2957, 500=0.2365 (NZD)", Storage Location="PCB Assembly WS", Supplier="ECE Dept", Supplier 1=Farnell, Viewing Angle=120°, Wavelength Typ=470
H1: library part JS_USB_MINI_B_SMT, "USB 2.0, Right Angle, SMT, B Type, Receptacle, 5 Position,", Manufacturer=FCI, Manufacturer PN=10033526-N3212MLF, Supplier Part Number 1=1824416, Storage Location="PCB Assembly WS", Supplier="ECE Dept", Supplier 1=Farnell
H2: library part JB_HDR_IDC_5X2_VERT, "IDC Header, 1,27mm, 10-Pin, Vert, SMT", Current Rating="1.5 A", Manufacturer="TE Connectivity", Manufacturer Part Number=1-188275-0, Supplier Part Number 1=A99476TR-ND, Mounting Angle=Vertical, Mounting Style=SMD/SMT, Number of Positions / Contacts=10, Pitch="1.27 mm", Storage Location="PCB Assembly WS", Supplier="ECE Dept", Supplier 1=Digi-Key
H3: library part JB_HDR_IDC_10X2_VERT, "IDC Header, 1,27mm, 20-Pin, Vert, SMT", Manufacturer="TE Connectivity", Manufacturer Part Number=2-188275-0, Supplier Part Number 1=A99481CT-ND, Mounting Angle=Vertical, Mounting Style=SMD/SMT, Number of Positions / Contacts=20, Pitch="1.27 mm", Storage Location="PCB Assembly WS", Supplier="ECE Dept", Supplier 1=Digi-Key
H4: library part JB_53261-03, "Header_Horiz_3Pos_1.25mm_125V@1A_SMT", Manufacturer=Molex, Manufacturer Part Number=53261-0390, Supplier Part Number 1=1125359, Contact Type="Blade Pin", Mounting Type="Surface Mount, Right Angle", Number of Positions=3, Pitch="0.049\" (1.25mm)", Storage Location="PCB Assembly WS", Supplier="ECE Dept", Supplier 1=Farnell, Supplier 2=Digi-Key, Supplier Part Number 2=WM1754CT-ND
L1 L2: library part IN_Ferrite-Bead, "Ferrite Bead, Rdc 0.3R, Z100MHZ 600R, Imax 1A, SMD 1206", DC Current Rating=1, DC Resistance Max=0.08, Ferrite Case Style="1206 ^3216 Metric]", Frequency Range="50MHz to 1", Impedance Tolerance="± 25%", Manufacturer=FAIR-RITE, Manufacturer Part Number=2512066017Y1, Supplier Part Number 1=1612060, Ferrite Mounting=SMD, Impedance=600, Manufacturer PN=2512066017Y1, Storage Location="PCB Assembly WS", Supplier="ECE Dept", Supplier 1=Farnell
MT1 MT2 MT3 MT4: library part MC_M3.2_HOLE, "Fixing M3.2 Mount Hole NPTH", Manufacturer=Hi-Q, Manufacturer PN="3BV series M3 Clearance", price=0, Supplier="ECE Dept"
R1: library part RS_62R, "RES 62 OHM 1/10W 5% 0603 SMD", Storage Location="PCB Assembly WS", Supplier="ECE Dept"
R2 R4 R20 R21: library part RS_220R, "RES 220 OHM 1/10W 5% 0603 SMD", Storage Location="PCB Assembly WS", Supplier="ECE Dept"
R3 R9 R10: library part RS_2K2, "RES 2.2K OHM 1/10W 5% 0603 SMD", Storage Location="PCB Assembly WS", Supplier="ECE Dept"
R5 R6 R19: library part RS_1K, "RES 1.0K OHM 1/10W 5% 0603 SMD", Storage Location="PCB Assembly WS", Supplier="ECE Dept"
R7 R8: library part RS_27R, "RES 27 OHM 1/10W 5% 0603 SMD", Storage Location="PCB Assembly WS", Supplier="ECE Dept"
R11 R12 R13 R14 R15 R18 R22: library part RS_100K, "RES 100K OHM 1/10W 5% 0603 SMD", Storage Location="PCB Assembly WS", Supplier="ECE Dept"
R16: library part RS_27K, "RES 27K OHM 1/10W 5% 0603 SMD", Storage Location="PCB Assembly WS", Supplier="ECE Dept"
R17: library part RS_47K, "RES 47.0K OHM 1/10W 5% 0603 SMD", Storage Location="PCB Assembly WS", Supplier="ECE Dept"
R23: library part RT_1R, "RES 1R OHM 1/4W 5% 1206 SMD", Storage Location="PCB Assembly WS", Supplier="ECE Dept"
RN41: "Bluetooth RN41"
SW1 SW2: library part "WS_KSR211G LFS", "SWITCH TACTILE SPST-NO SMD", Contact Current Max=50, Contact Resistance=100, Contact Voltage DC Nom=32, Manufacturer="C & K COMPONENTS", Manufacturer Part Number="KSR211G LFS", Operating Force=1.8, Supplier Part Number 1=1437634, Contact Configuration=SPST-NO, Pricing="1=0.538, 50=0.477, 100=0.416, 2500=0.219 (NZD)", Storage Location="PCB Assembly WS", Supplier="ECE Dept", Supplier 1=Farnell
U1: library part SE_ATSAM4S16BA-MU, "IC MCU 32BIT 512KB FLASH 64LQFP", Manufacturer=Atmel, Package / Case=64-LQFP, Supplier Part Number 1=ATSAM4S8BA-ANRCT-ND, Voltage - Supply (Vcc/Vdd)="1.62 V ~ 3.6 V", Code_JEDEC=MO-220VMMD-3, ComponentLink1Description="Manufacturer URL", ComponentLink1URL=http://www.atmel.com/, ComponentLink2Description="SAM4S Series Datasheet", ComponentLink2URL=http://www.atmel.com/dyn/resources/prod_documents/11100.pdf, ComponentLink3Description="SAM4S Series Summary", ComponentLink3URL=http://www.atmel.com/dyn/resources/prod_documents/11100S.pdf, Connectivity="I²C, IrDA, Memory Card, SPI, SSC, UART/USART, USB", Core Processor="ARM® Cortex®-M4", Core Size=32-Bit, Data Converters="A/D 11x12b, D/A 2x12b", Manufacturer Part Number=ATSAM4S8BA-ANR, Number of I/O=47, PackageDescription="64-Pin Quad Flat No-Lead (QFN) Sawn, 9 x 9 x 1.0 mm Body, 0.5 mm Pitch, Exposed Pad", PackageReference=64PS, PackageVersion="revJ, Jul-2007", Packaging="Cut Tape (CT)", Peripherals="Brown-out Detect/Reset, DMA, POR, PWM, WDT", Program Memory Size="512KB (512K x 8)", Program Memory Type=FLASH, RAM Size="128K x 8", Speed=120MHz, Supplier 1=Digi-Key
U2 U3: library part SV_TLV70233DBVR, "IC REG LDO 3.3V 0.3A SOT23-5", Current - Output=300mA, Manufacturer="Texas Instruments", Operating Temperature="-40°C ~ 125°C", Package / Case="SC-74A, SOT-753", Supplier Part Number 1=296-32415-1-ND, Manufacturer Part Number=TLV70233DBVR, Pricing="1=0.77, 10=0.647, 25=0.5672, 100=0.4853, 250=0.421, 500=0.35658, 750=0.30789, 1000=0.2749 (NZD)", Supplier 1=Digi-Key
Y1: library part XT_CRYSTAL_18.432MHz_13pF, "18.432 MHZ 4PF  6.0X3.5mm SMD", ESR (Equivalent Series Resistance)="40 Ohm", Frequency Stability=±50ppm, Frequency Tolerance=±30ppm, Load Capacitance=13pF, Manufacturer="CTS-Frequency Controls", Manufacturer Part Number=406C35B18M43200, Package / Case="4-SMD, No Lead (DFN, LCC)", Supplier Part Number 1=CTX668CT-ND, Frequency=18.432MHz, Height="0.047\" (1.20mm)", Mounting Type="Surface Mount", Size / Dimension="0.236\" L x 0.138\" W (6.00mm x 3.50mm)", Supplier 1=Digi-Key

## Via types
v1: diameter 0.6, hole 0.3, Top Layer to Bottom Layer, 65 vias
v2: diameter 1, hole 0.5, Top Layer to Bottom Layer, 58 vias
v3: diameter 2, hole 1, Top Layer to Bottom Layer, 4 vias
v4: diameter 0.6, hole 0.3, Top Layer to Bottom Layer, tented top, 2 vias
v5: diameter 0.5, hole 0.3, Top Layer to Bottom Layer, 1 vias

## Nets (pads, with @x,y where several pads share a name; then routed paths per layer and width w, separated by ;. In a path a pad name is that pad's centre, name@x,y a point inside that pad or via, vN(x,y) a via of type N, cw(c..) or ccw(c..) an arc to the next point about the centre after c; other vN are vias at no path point)
+3V3: C4.2 C9.1 C10.2 C11.2 C12.2 C13.2 C14.2 H3.1 H3.2 R11.2 R12.2 R13.2 R14.2 R15.2 TP1.1 TP26.1 U1.1 U1.7 U1.18 U1.45 U1.58 U3.5 | length 44.3
  Top Layer w0.15: v1(31.75,55.75) 31.775,55.725 U1.7 ; v1(31.75,58.75) 31.775,58.725 U1.1 ; v1(35.5,47.75) U1.18 ; v1(38,58.75) U1.58 ; v1(42.25,56.75) 42.725,57.225 U1.45
  Top Layer w0.3: v2@27.95,75.7 v2(28,75.75) 29.25,75.75 29.75,75.25 TP26.1 ; v2(38.75,73.25) TP1.1 ; H3.2@72,74.28 H3.2 ; H3.1 H3.1@73.274,69.25
  Top Layer w0.5: v2@73.235,66.515 H3.1
  Top Layer w0.75: U3.5 v2@27.95,75.7 ; C9.1 v2(28,75.75) ; R11.2 v2(57.125,58.75) R12.2 ; v2(61,58.75) R13.2 ; R14.2 v2(68.375,58.75) R15.2 ; H3.2 73.675,74.25 74.225,74.8 v2(74.225,75.7) ; v2@73.235,66.515 73.235,65.515 73.5,65.25 C4.2
  Bottom Layer w0.3: C14.2 v1(31.75,55.75) ; C10.2 v1(31.75,58.75) ; C11.2 34.5,46.5 35.5,47.5 v1(35.5,47.75) ; v1(38,58.75) 38.7,58.05 C13.2 ; C12.2 41.95,56.45 v1(42.25,56.75)
  other v2: 73.25,66.5
+3V3COMM: C6.1 C7.2 DL4.2 GPIO5.1 GPIO6&7.1 R18.2 R19.2 RN41.3 RN41.4 RN41.11 U2.5 | length 29.6
  Top Layer w0.3: DL4.2 DL4.2@27.225,8.1 ; v2(31.5,13.4) R18.2 ; RN41.3 RN41.3@50.1,6.675 ; RN41.4@50.1,7.825 RN41.4 RN41.4@50.2,7.975 ; R19.2 v2(55.5,8.6) ; C6.1 C6.1@69.875,34
  Top Layer w0.75: DL4.2@27.225,8.1 v1(27.225,9.4) 26.275,9.4 24.575,7.7 24.575,7.05 25.6,6.025 GPIO5.1 ; RN41.11 v2(51.85,16.25) ; RN41.3@50.1,6.675 v2(51.825,6.675) 52.325,7.175 C7.2 ; RN41.4@50.1,7.825 v1(51.825,7.825) ; GPIO6&7.1 U2.5 v2(69.75,35.85) C6.1
+5V: "REG 5V.1" C5.1 C8.1 D1.2 D2.2 U2.1 U3.1 U3.3 | length 28.3
  Top Layer w0.3: 21.7,74.475 21.7,74.5 ; U3.3@23.1,73.85 U3.3 ; v2@74.55,39.05 v2@74.6,39
  Top Layer w0.75: v3(17.625,77.375) 17.775,77.525 19.7,77.525 20.5,76.725 C8.1 ; v2(17.95,75.05) 17.975,75.025 v2(19.425,75.025) v2@19.4,75.05 ; 21.7,74.475 22.375,73.8 U3.3 ; 21.7,74.5 v2(21.7,77.9) ; U3.1 v2(23.15,77.85) ; v2(70.3,45.25) v2(72.025,45.25) ; U2.1@72.35,39.05 U2.1 74.55,39.05 74.75,39.25 v2(74.7,39.25) 75.475,40.025 78.6,40.025 ; C5.1@74.6,37.575 v2@74.6,39
  Bottom Layer w0.75: v2(19.425,75.025) D2.2 ; D1.2 67.65,45.25 v2(70.3,45.25)
ERASE: TP2.1 U1.55 | length 9.4
  Top Layer w0.15: U1.55 39.5,62
  Top Layer w0.3: 39.5,62 41,63.5 TP2.1
GND: "REG GND.1" "SAM4S GND.1" C1.1 C2.1 C3.1 C4.1 C5.2 C6.2 C7.1 C8.2 C9.2 C10.1 C11.1 C12.1 C13.1 C14.1 C15.1 C16.1 C17.1 C18.1 C19.1 C20.1 H1.5 H1.6 H1.7 H1.8 H1.9 H2.2 H2.6 H2.8 H3.4 H3.6 H3.8 H3.10 H3.12 H3.14 H3.16 H3.18 H3.20 R1.2 R2.2 R4.2 R17.1 R21.2 R22.1 RN41.1 RN41.12 RN41.28 RN41.29 RN41.36 RN41.37 RN41.38 RN41.39 SW1.2 SW2.2 TP28.1 TP30.1 U1.2 U1.17 U1.40 U1.46 U1.50 U1.60 U2.2 U2.4 U3.2 U3.4 | length 155.8
  Top Layer w0.15: v1(31,57.75) 31.715,57.75 32.19,58.225 U1.2 ; v1(33.75,49.5) 33.8,49.45 U1.17 ; v1(37,58.75) U1.60 ; v1(41.5,54.25) 41.975,54.725 U1.40 ; U1.50 v1(42,62.5) ; v1(42.25,57.75) 42.275,57.725 U1.46
  Top Layer w0.3: H1.7 4.8,59.3 5.25,59.75 v3(5.5,59.75) 5.75,59.75 6.2,59.3 H1.6 ; H1.9 5.05,68.2 v3(5.5,67.75) 6,68.25 H1.8@8.2,68.25 ; H1.5 v3(10.9,62.15) ; v2(11.45,55) TP30.1 ; v2(18.75,59.25) 20.25,59.25 20.5,59 SW1.2 ; R17.1 19.775,71.125 v1(19.775,72.45) 19.775,72.775 20.5,73.5 C8.2 ; v1(22.3,7.75) R21.2 ; U3.2 24,74.75 24.5,74.25 24.5,73.8 ; v1(24.5,72.35) 24.5,73.8 ; U3.4 24.5,73.8 ; v1(31.5,5.675) R22.1 ; v1(36.25,18.825) 37.05,18.825 RN41.38 ; v1(36.275,2.35) RN41.37 ; RN41.28 v1(40.275,21.85) ; R1.2 43,75 43.25,75.25 v2(44.5,75.25) ; R2.2 v2(44.5,75.25) ; R4.2 46,75 45.75,75.25 v2(44.5,75.25) ; RN41.29 v1(46.575,21.875) ; H3.20@49.13,74.5 49.13,76.63 49.5,77 v2@50.375,77 ; RN41.36 v1(50.675,2.35) ; RN41.39 49.9,18.825 v1(50.7,18.825) ; RN41.1 RN41.1@50.1,4.225 ; RN41.12 v1(51.85,17.45) ; v2(50.375,76.875) v2@50.375,77 ; H3.18@51.67,74.5 51.67,76.58 51.25,77 v2@50.375,77 ; H3.16 54.25,76.5 54.5,76.75 v2(55.5,76.75) 56.5,76.75 56.79,76.46 H3.14 ; H3.12 59.25,74.33 59.25,76.25 59.75,76.75 v2(60.5,76.75) 61.32,76.75 61.87,76.2 H3.10 ; H3.8 64.41,76.41 64.75,76.75 v2(65.5,76.75) 66.5,76.75 66.95,76.3 H3.6 ; v2(68.25,41) 69.6,41 U2.4@69.65,40.95 ; H3.4 69.49,76.74 v2(69.5,76.75) ; U2.2@72.85,40 73.625,40 74.7,41.075 v2(74.7,41.15) ; v2(73.875,31.35) 73.875,28.625 73.9,28.6 ; C5.2@74.6,36.175 C5.2@74.65,36.125 ; C3.1 v1(79.475,45.5)
  Top Layer w0.5: H2.2@79.211,49.805 H2.2@79.421,49.805 ; H2.6@79.211,54.885 79.326,55 v2(82,55) ; H2.8@79.211,57.425 H2.8@79.286,57.5 ; H2.2 v2(82.13,49.73) ; H2.8 v2(81.975,57.35)
  Top Layer w0.75: v2(28,71.25) C9.2 ; RN41.1@50.1,4.225 v2(53.9,4.225) C7.1 ; SW2.2 v2(61.25,50) ; 69.75,28.625 v2(69.75,31.275) C6.2 ; v2(74.65,34.65) C5.2@74.65,36.125 ; C4.1 v2(78.25,65.25) 79.75,65.25 80.25,65.75 TP28.1
  Bottom Layer w0.3: C20.1 18.75,60.7 v2(18.75,59.25) ; v1(28.25,55.75) C14.1 ; v1(28.25,58.75) C10.1 ; v5(29.25,63) C19.1 ; C1.1 29.75,65.5 v2(29,66.25) 29.5,66.75 C2.1 ; C11.1 32.1,47.9 33.7,49.5 v1(33.75,49.5) ; v1(37,58.75) 37.3,58.45 C13.1 ; C15.1 v1(38.75,55.25) 39,55.5 C12.1 ; C16.1@37.7,53.5 C16.1 v1(38.75,53.25) ; C18.1@41,56.8 41.95,57.75 v1(42.25,57.75) ; C17.1 41.45,54.2 v1(41.5,54.25)
  other v2: 49,35 55.5,35
GPIO1: H4.1 U1.52 | length 41.1
  Top Layer w0.15: v1(40.535,62) 41,61.535 U1.52
  Top Layer w0.3: H4.1 9.7,51.875 10.475,52.65 v1(10.475,56.7) ; v1(24.85,58.175) 27.725,61.05 v1(33.45,61.05)
  Bottom Layer w0.3: v1(10.475,56.7) 11.95,58.175 v1(24.85,58.175) ; v1(33.45,61.05) 34.4,62 v1(40.535,62) v1@40.635,61.9
GPIO2: H4.2 U1.42 | length 51.8
  Top Layer w0.15: U1.42 45.31,55.725 45.535,55.5 v1(46.575,55.5)
  Top Layer w0.3: H4.2 12.025,50.625 14.925,47.725 27.05,47.725 27.75,48.425 v1(33.675,48.425) ; v1(44.55,48.225) 46.025,48.225 v1(47.65,49.85)
  Bottom Layer w0.3: v1(33.675,48.425) 34.75,49.5 43.925,49.5 44.55,48.875 v1(44.55,48.225) ; v1(46.575,55.5) 47.65,54.425 v1(47.65,49.85)
GPIO3: H4.3 U1.41 | length 47.8
  Top Layer w0.15: U1.41 45.026,55.225 45.276,54.975 v1(45.9,54.975)
  Top Layer w0.3: H4.3 11.825,49.375 14.35,46.85 27.25,46.85 27.975,47.575 v1(33.7,47.575) ; v1(43.275,48.85) 45.025,48.85 v1(46.5,50.325)
  Bottom Layer w0.3: v1(33.7,47.575) 34.975,48.85 v1(43.275,48.85) ; v1(45.9,54.975) 46.5,54.375 v1(46.5,50.325)
LED1: DL1.2 U1.48 | length 19.2
  Top Layer w0.15: U1.48 45.475,58.725
  Top Layer w0.3: DL1.2 43,65.75 44,64.75 48.25,64.75 48.75,64.25 48.75,59.25 48.225,58.725 45.475,58.725
LED2: DL2.2 U1.47 | length 19.4
  Top Layer w0.15: U1.47 45.475,58.225
  Top Layer w0.3: DL2.2 44.5,65.75 45,65.25 48.5,65.25 49.25,64.5 49.25,58.75 48.725,58.225 45.475,58.225
LED3: DL3.2 U1.44 | length 20.2
  Top Layer w0.15: U1.44@44.3,56.75 U1.44 45.725,56.725 45.75,56.75
  Top Layer w0.3: 45.75,56.75 49.25,56.75 49.75,57.25 49.75,64.75 48.75,65.75 46.5,65.75 46,66.25 DL3.2
NetC1_2: C1.2 U1.62 Y1.3 | length 10.4
  Top Layer w0.15: U1.62 36,62 36,62.575
  Top Layer w0.3: v1(33.425,64.125) 34.45,64.125 36,62.575
  Bottom Layer w0.3: C1.2 34.1,65.5 Y1.3 33.6,64.8 33.425,64.625 v1(33.425,64.125)
NetC2_2: C2.2 U1.61 Y1.1 | length 16.1
  Top Layer w0.15: U1.61 36.5,62.525
  Top Layer w0.3: v2(33.4,66.75) 35.25,66.75 36.5,65.5 36.5,62.525
  Bottom Layer w0.3: C2.2 v2(33.4,66.75) 33.8,67.15 37.15,67.15 Y1.1@37.15,69.25
NetC3_2: C3.2 D1.1 H2.1 | length 22.9
  Top Layer w0.3: v2(69.775,48.525) 69.776,48.526 72.365,48.526 ; H2.1@74.365,48.526 72.365,48.526 ; C3.2@76.5,45.5 75,45.5 74.365,46.135 72.765,46.135 72.365,46.535 72.365,48.526
  Bottom Layer w0.3: D1.1 60.675,47.425 61.775,48.525 v2(69.775,48.525)
NetC19_2: C19.2 L2.1 R23.2 U1.64 | length 15.5
  Top Layer w0.15: U1.64 35,61.75
  Top Layer w0.3: v1(33.75,63) 35,61.75
  Bottom Layer w0.3: R23.2 L2.1 27.25,63.25 28.5,64.5 31.5,64.5 32,64 32,63.2 C19.2 v1(33.75,63)
NetC20_2: C20.2 R23.1 | length 2.4
  Bottom Layer w0.3: C20.2 R23.1
NetD2_1: D2.1 L1.2 | length 12.1
  Top Layer w0.3: L1.2@15.425,74.5 16.5,74.5 17.5,73.5 v1(17.5,72)
  Bottom Layer w0.3: v1(17.5,72) 17.5,68.5 17.925,68.075 D2.1
NetDL1_1: DL1.1 R1.1 | length 1.8
  Top Layer w0.3: DL1.1 R1.1
NetDL2_1: DL2.1 R2.1 | length 1.8
  Top Layer w0.3: DL2.1 R2.1
NetDL3_1: DL3.1 R4.1 | length 1.8
  Top Layer w0.3: DL3.1 R4.1
NetDL4_1: DL4.1 R20.2 | length 5.5
  Top Layer w0.3: DL4.1 28.8,9.05 29.3,9.55 R20.2
NetDL5_1: DL5.1 R21.1 | length 3
  Top Layer w0.3: R21.1 DL5.1
NetDL5_2: DL5.2 GPIO2.1 RN41.19 | length 22.4
  Top Layer w0.3: GPIO2.1@17.875,15.425 17.9,15.4 DL5.2 33,15.4 35.7,12.7 35.7,10.517 35.967,10.25 RN41.19
NetR3_1: R3.1 U1.26 | length 15.7
  Top Layer w0.15: 37.25,51.75 39,51.75 39.5,51.25 U1.26
  Top Layer w0.3: R3.1 32.5,49.5 33.3,50.3 34.45,50.3 34.5,50.25 36,51.75 37.25,51.75
NetR3_2: R3.2 SW1.1 | length 5
  Top Layer w0.3: SW1.1 23.5,50 24,49.5 R3.2
NetR5_1: R5.1 U1.23 | length 5.2
  Top Layer w0.3: R5.1 U1.23
NetR5_2: R5.2 RN41.16 RTS1.1 | length 52.9
  Top Layer w0.3: RTS1.1 30.667,19.15 35.967,13.85 RN41.16 36.9,13.875 38,13.875 39.125,15 v4(39.125,18.45) ; v1(38,35.5) R5.2
  Bottom Layer w0.3: v1(38,35.5) 38,19.575 v4(39.125,18.45)
NetR6_1: R6.1 U1.11 | length 6.5
  Top Layer w0.15: v1(31.5,54) 31.775,53.725 U1.11
  Bottom Layer w0.3: R6.1 29,52.5 29.5,53 30.5,54 v1(31.5,54)
NetR6_2: R6.2 RN41.14 RXD1.1 | length 51.2
  Top Layer w0.3: RXD1.1 v1(28.8,22.875) 35.425,16.25 RN41.14 ; v1(28.8,29.5) v1(28.8,37.725)
  Bottom Layer w0.3: R6.2 27.5,39.025 v1(28.8,37.725) ; v1(28.8,22.875) v1(28.8,29.5)
NetR7_2: R7.2 U1.57 | length 3
  Top Layer w0.15: R7.2 38,62.5 38.5,62 U1.57
NetR8_2: R8.2 U1.56 | length 2.9
  Top Layer w0.15: U1.56 39,62.25 39.25,62.5 R8.2
NetR9_2: R9.2 R10.2 U1.31 | length 38.3
  Top Layer w0.15: 42,48 U1.31
  Top Layer w0.3: 42,48 42.5,47.5 66.75,47.5 67.25,48 v2(67.25,49.75) ; R10.2 67,53.75 67.25,54 v2(67.25,54.75) 67.25,55.25 67.5,55.5 R9.2
  Bottom Layer w0.3: v2(67.25,49.75) v2(67.25,54.75)
NetR18_1: GPIO3.1 R18.1 RN41.20 | length 22.2
  Top Layer w0.3: GPIO3.1 v1(21.05,11.675) ; v1(24.625,11.65) 30.3,11.65 30.55,11.9 R18.1 34.75,11.9 35.025,11.625 35.025,9.525 35.5,9.05 RN41.20
  Bottom Layer w0.3: v1(21.05,11.675) 24.6,11.675 v1(24.625,11.65)
NetR19_1: R19.1 RESET.1 RN41.5 U1.13 | length 73.9
  Top Layer w0.15: v1@31.6,52.6 v1(31.725,52.725) U1.13
  Top Layer w0.3: RN41.5 51.475,9.05 52.525,10.1 53.05,10.1 ; v1(53.1,37.65) 53.1,13.6 v1(53.075,13.575) ; R19.1 53.05,10.1 ; RESET.1 53.1,13.55 v1(53.075,13.575) ; 53.05,10.1 53.075,10.125 v1(53.075,13.575)
  Bottom Layer w0.3: v1(31.725,52.725) 31.725,49.225 31.2,48.7 31.2,43.3 34.15,40.35 51.225,40.35 53.1,38.475 v1(53.1,37.65)
NetR20_1: R20.1 RN41.21 | length 3.8
  Top Layer w0.3: R20.1 35.3,8.05 35.5,7.85 RN41.21
NetR22_2: GPIO4.1 R22.2 RN41.22 | length 24.6
  Top Layer w0.3: GPIO4.1 20.9,7.9 25.675,3.125 32.85,3.125 33.15,3.425 R22.2 34.7,4.175 35,4.475 35,6.15 35.5,6.65 RN41.22
NetRN41_13: RN41.13 TXD1.1 U1.14 | length 58.8
  Top Layer w0.15: v1(30.65,52.225) 30.675,52.2 33.2,52.2 U1.14
  Top Layer w0.3: TXD1.1 35.3,26.575 35.35,26.525 ; v1(34.675,37.725) 35.35,37.05 35.35,26.525 ; RN41.13 35.8,17.45 35.35,17.9 35.35,26.525
  Bottom Layer w0.3: v1(30.65,52.225) 30.65,41.75 v1(34.675,37.725)
NetRN41_15: CTS1.1 RN41.15 U1.25 | length 45.4
  Top Layer w0.3: RN41.15 38,15.05 38.3,15.35 v4(38.3,17.85) ; v1(37,35.5) 37,43 37.5,43.5 39,43.5 39.25,43.75 ; U1.25 39,48.415 39.085,48.415 39.5,48 39.5,44 39.25,43.75 ; CTS1.1@42,38 CTS1.1@42.5,37.5 ; CTS1.1 42.2,40.8 39.25,43.75
  Bottom Layer w0.3: v1(37,35.5) 37,19.15 v4(38.3,17.85)
NetTP4_1: TP4.1 U1.20 | length 6.2
  Top Layer w0.15: TP4.1 35.125,46.15 36.5,47.525 U1.20
NetTP6_1: TP6.1 U1.28 | length 6.3
  Top Layer w0.15: U1.28 40.5,48.05 42.225,46.325 TP6.1
NetTP14_1: "COMM ENABLE.1" U1.38 U2.3 | length 55.4
  Top Layer w0.15: U1.38 45.31,53.725 45.5,53.535 v1(45.5,53.5)
  Top Layer w0.3: 65.55,28.65 65.55,31.625 60,37.175 60,39.875 v2(59.9,39.975) 60,40.075 60,42 61,43 71.5,43 72.5,42 72.5,41.1 U2.3@72.35,40.95
  Bottom Layer w0.3: v1(45.5,53.5) 45.5,47 50.5,42 58,42 v2@60,40
NRST: H3.15 R11.1 SW2.1 TP7.1 U1.39 | length 34.5
  Top Layer w0.15: U1.39 45.725,54.225
  Top Layer w0.3: 45.725,54.225 57.975,54.225 58.75,55 SW2.1 ; v2(53.5,57.5) 53.5,60.75 54.25,61.5 55.25,61.5 ; R11.1 55.25,61.5 ; TP7.1 55.25,61.5
  Top Layer w0.5: TP7.1 55.25,66.5 55.52,66.77 H3.15
  Bottom Layer w0.3: v2(53.5,54.25) v2(53.5,57.5)
SCL: H2.5 R9.1 U1.36 | length 31.7
  Top Layer w0.15: U1.36 45.725,52.725
  Top Layer w0.3: 45.725,52.725 69,52.725 ; R9.1 69,52.725 ; H2.5@74.289,53.615 70.865,53.615 69.975,52.725 69,52.725
SDA: H2.7 R10.1 U1.43 | length 33.1
  Top Layer w0.15: U1.43 45.725,56.225
  Top Layer w0.3: 45.725,56.225 55.725,56.225 56.25,56.75 56.25,57.5 56.7,57.95 61.3,57.95 62,57.25 62,56.75 62.595,56.155 66,56.155 ; R10.1 66,56.155 ; H2.7@74.289,56.155 66,56.155
TCK: H3.9 R13.1 TP9.1 U1.53 | length 33.7
  Top Layer w0.15: U1.53 40.5,59.465 40.965,59
  Top Layer w0.3: 40.965,59 43,59 43.5,59.5 46.25,59.5 v1(46.75,60) ; R13.1 v2(62.75,61.25) TP9.1
  Top Layer w0.5: TP9.1 62.75,66.25 63.14,66.64 H3.9
  Bottom Layer w0.3: v1(46.75,60) 61.5,60 v2(62.75,61.25)
TDI: H3.5 R15.1 TP11.1 U1.33 | length 46.2
  Top Layer w0.15: U1.33 45.975,51.225 46,51.25
  Top Layer w0.3: 46,51.25 v2(69.5,51.25) ; R15.1 v2(70.25,61.25) TP11.1
  Top Layer w0.5: H3.5 68.25,69.299 68.25,66.75 68.75,66.25 70,66.25 70.25,66 TP11.1
  Bottom Layer w0.3: v2(69.5,51.25) 70.25,52 v2(70.25,61.25)
TDO: H3.13 R12.1 TP8.1 U1.49 | length 27.3
  Top Layer w0.15: U1.49 42.5,61.535 42.715,61.75 43.25,61.75
  Top Layer w0.3: 43.25,61.75 45.25,61.75 45.5,61.5 v1(46.75,61.5) ; R12.1 v2(59,61.25) TP8.1
  Top Layer w0.5: H3.13 58.06,66.81 59,65.87 TP8.1
  Bottom Layer w0.3: v1(46.75,61.5) 58.75,61.5 v2(59,61.25)
TMS: H3.7 R14.1 TP10.1 U1.51 | length 38
  Top Layer w0.15: 41.25,62 41.5,61.75 U1.51
  Top Layer w0.3: 41.25,62 41.25,62.75 41.5,63 41.6,63.1 46.95,63.1 v1(46.975,63.125) ; R14.1 v2(66.5,61.25) TP10.1
  Top Layer w0.5: H3.7 65.75,69.259 65.75,66.75 66.5,66 TP10.1
  Bottom Layer w0.3: v1(46.975,63.125) 64.625,63.125 v2(66.5,61.25)
"USB DETECT": R16.1 R17.2 U1.35 | length 45.4
  Top Layer w0.3: R17.2 19.75,68.25 20,68 21.75,68 ; R16.1 21.75,68 ; v2(24,62.5) 24,51 24.75,50.25 27.224,50.25 27.474,50 32.364,50 33.114,50.75 34.001,50.75 34.3,51.049 ; v2(24,66) 24,67.5 23.5,68 21.75,68 ; 34.3,51.05 35.75,52.5 39.75,52.5 40.025,52.225 U1.35
  Bottom Layer w0.3: v2(24,62.5) v2(24,66)
USB_N: H1.2 R8.1 TP3.1 | length 38.4
  Top Layer w0.381: H1.2 9.94,64.55 10.023,64.468 14,64.468 ; TP3.1 14,64.468 ; 38.885,65.5 38.885,66.615 37.25,68.25 28.352,68.25 27.5,67.398 27.5,65.25 26.718,64.468 14,64.468 ; 39,65.35 39,65 R8.1
USB_P: H1.3 R7.1 TP5.1 | length 37.1
  Top Layer w0.381: H1.3 9.94,63.75 10.023,63.833 14,63.833 ; TP5.1 14,63.833 ; R7.1 38.25,65 38.25,65.35 ; 38.25,65.5 38.25,66.25 36.885,67.615 28.615,67.615 28.135,67.135 28.135,64.987 26.981,63.833 14,63.833
VBUS: H1.1 L1.1 R16.2 TP25.1 | length 29.3
  Top Layer w0.3: H1.1 10.1,65.35 ; 12.25,69.75 12.25,72 12,72.25 TP25.1 11.25,73 v2(12.5,73) ; R16.2 21.75,72.25 v2(22,72.5)
  Top Layer w0.75: 10.1,65.35 10.75,66 10.75,69 11.5,69.75 12.25,69.75 14.25,69.75 14.75,70.25 L1.1
  Bottom Layer w0.3: v2(12.5,73) 17.369,73 17.668,73.3 19.831,73.3 20.631,72.5 v2(22,72.5)
VDDOUT: C15.2 C16.2 C17.2 C18.2 L2.2 TP27.1 U1.8 U1.12 U1.24 U1.54 | length 45.5
  Top Layer w0.15: U1.12 v1@34.975,53.225 ; U1.8 v1@34.975,55.225 ; U1.24 v1(38.5,51) ; v1(40,59) U1.54
  Top Layer w0.254: v1@34.975,53.225 v1(35,53.25) ; v1@34.975,55.225 v1(35,55.25)
  Top Layer w0.3: TP27.1 26.5,56.5 29.775,53.225 31.376,53.225 31.476,53.325 31.974,53.325 32.074,53.225 U1.12
  Bottom Layer w0.3: L2.2 32.75,60.75 35,58.5 35,56.325 ; C15.2 C16.2 v1(35,53.25) ; C17.2@40,52.55 C17.2 40,52.5 v1(38.5,51) 36.5,51 35,52.5 v1(35,53.25) ; v1@40.1,58.9 v1(40,59) 40.725,59 40.875,58.85 C18.2 40.85,58.2 40.2,58.2 39.8,57.8 39.8,56.575 39.55,56.325 35,56.325 ; v1(35,53.25) v1(35,55.25) 35,56.325
pads on no net: H1.4 H1.MH1 H1.MH2 H2.3 H2.4 H2.9 H2.10 H3.3 H3.11 H3.17 H3.19 H4.M MT1.1 MT2.1 MT3.1 MT4.1 RN41.2 RN41.6 RN41.7 RN41.8 RN41.9 RN41.10 RN41.17 RN41.18 RN41.23 RN41.24 RN41.30 RN41.31 RN41.32 RN41.33 RN41.34 RN41.35 U1.3 U1.4 U1.5 U1.6 U1.9 U1.10 U1.15 U1.16 U1.19 U1.21 U1.22 U1.27 U1.29 U1.30 U1.32 U1.34 U1.37 U1.59 U1.63 Y1.2 Y1.4

## Polygon pours and split planes (outlines as drawn)
GND on Gnd (split plane): 84.49,0.51 0.51,0.51 0.51,79.49 84.49,79.49
+5V on DC Power (split plane): 84.49,38.479 71.204,38.479 71.204,47.934 72.363,52.682 74.688,62.207 74.979,63.397 75.961,67.42 75.961,67.435 75.964,67.451 75.964,68.497 75.967,68.509 75.967,71.528 75.967,73.038 75.967,76.488 75.957,76.537 75.929,76.579 75.667,76.842 75.625,76.87 75.575,76.88 18.75,76.88 18.7,76.87 18.658,76.842 18.63,76.8 18.621,76.75 18.621,73.88 9.879,73.88 9.879,79.49 84.49,79.49
+3V3COMM on DC Power (split plane): 74.221,3.204 26.004,3.204 26.004,36.721 74.221,36.721
+3V3 on DC Power (split plane): 9.621,73.75 9.63,73.7 9.658,73.658 9.7,73.63 9.75,73.621 18.75,73.621 18.8,73.63 18.842,73.658 18.87,73.7 18.88,73.75 18.88,76.621 75.521,76.621 75.708,76.434 75.708,73.038 75.708,71.528 75.708,68.519 75.706,68.507 75.706,67.466 74.727,63.459 74.437,62.268 72.112,52.743 70.949,47.981 70.949,47.965 70.946,47.95 70.946,38.35 70.955,38.3 70.983,38.258 71.025,38.23 71.075,38.221 84.49,38.221 84.49,0.51 0.51,0.51 0.51,79.49 9.621,79.49

## Keep-outs
Keep-Out Layer:
  lines w0.3: 1.3,56 1.3,1.3 30.975,1.3 ; 1.3,71.25 1.3,78.7 83.7,78.7 83.7,1.3 54.025,1.3

## Other copper
DC Power (plane layer: these items are gaps in the copper):
  lines w0.254: 9.75,80 9.75,73.75 18.75,73.75 18.75,76.75 71.075,76.75 75.575,76.75 75.838,76.488 75.838,73.038 75.838,71.528 75.838,68.509 ; 75.835,68.507 75.835,67.451 74.853,63.428 ; 85,45 85,38.35 71.075,38.35 71.075,47.95 72.237,52.713 ; 72.237,52.713 72.238,52.713 ; 72.238,52.713 74.563,62.238 74.853,63.428 ; 74.853,63.428 74.853,63.428 ; 25.875,3.075 74.35,3.075 74.35,36.85 25.875,36.85 25.875,3.075

## Silkscreen, mask and mechanical layers (free items; w line width, h text height)
Top Overlay:
  text "Super Comms / Board V1001" at 2.575,38.575 h4
  text "GND" at 47.925,33.125 h0.8
  text "GND" at 54.4,33.125 h0.8
  text "Created by  /   Igor and Tim" at -12.275,31.225 h3
  text "Group 7" at 6.65,29.875 h3
  text "In memory of" at 47.025,13.875 h3
  text "All the / other robots" at 46.475,8.875 h3
PCB Boundary:
  the board outline again, w0.3
Drill Drawing:
  text ".LEGEND" at 88.28,7.03 h0.8
  text "Drill Drawing." at 90.5,4 h0.8

## Dimensions
0,0 to 0,80 on Dimension
0,0 to 85,0 on Dimension

## Text inside footprints (layer, text, board x,y; h text height)
H1: Dimension "PCB Edge" at 0.068,67.786 h0.25 r270